# EAGLE board XM125_Breakout-Panel (EAGLE 9.6.2), part 1 of 4
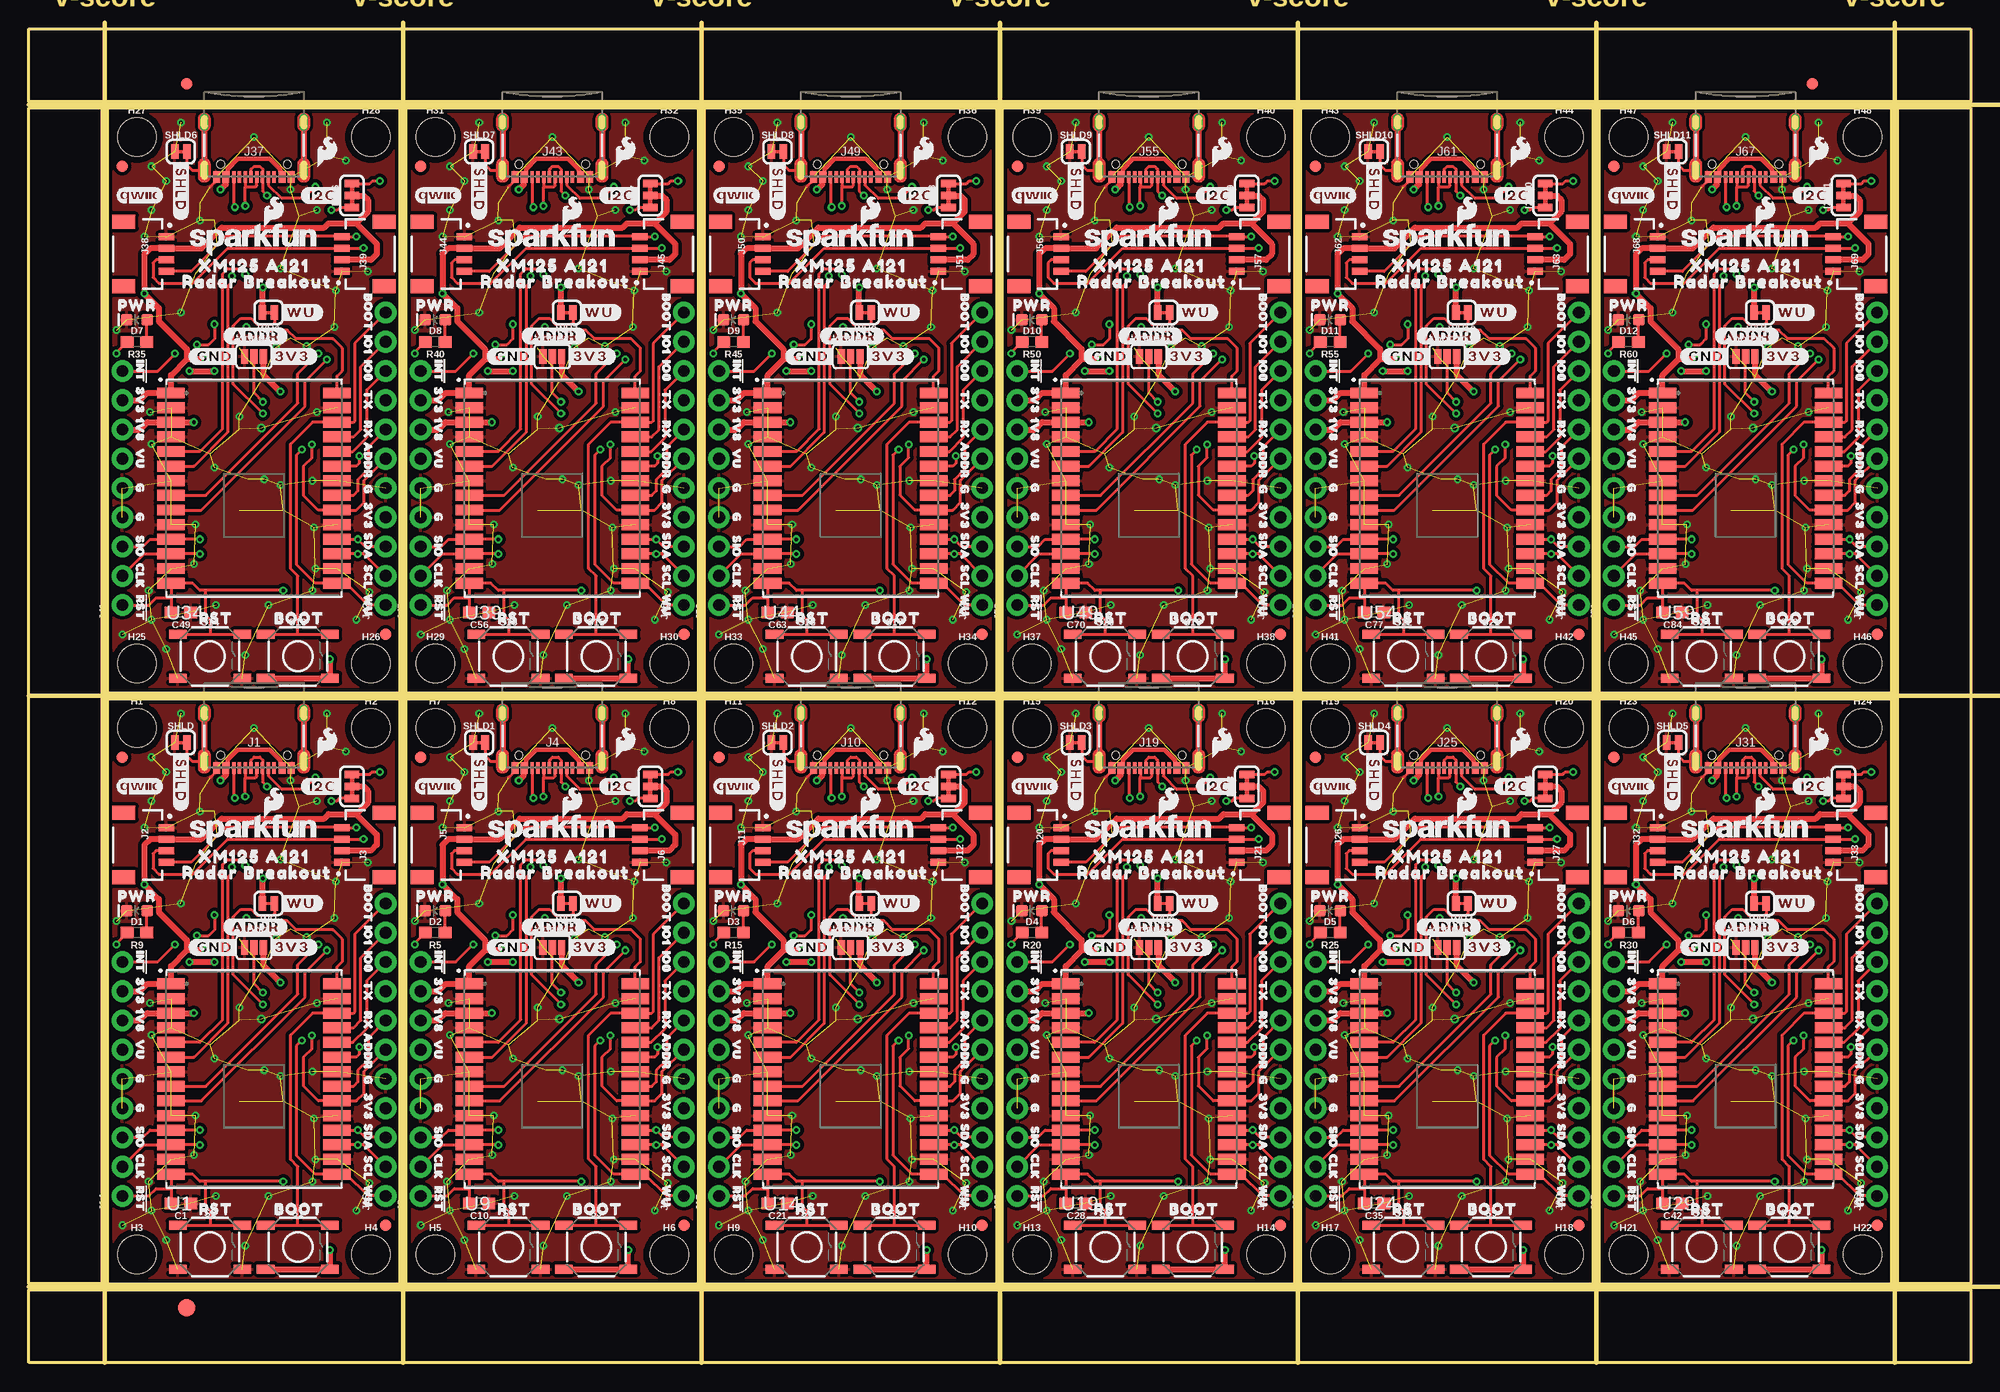
[diagram p0: board, top side]
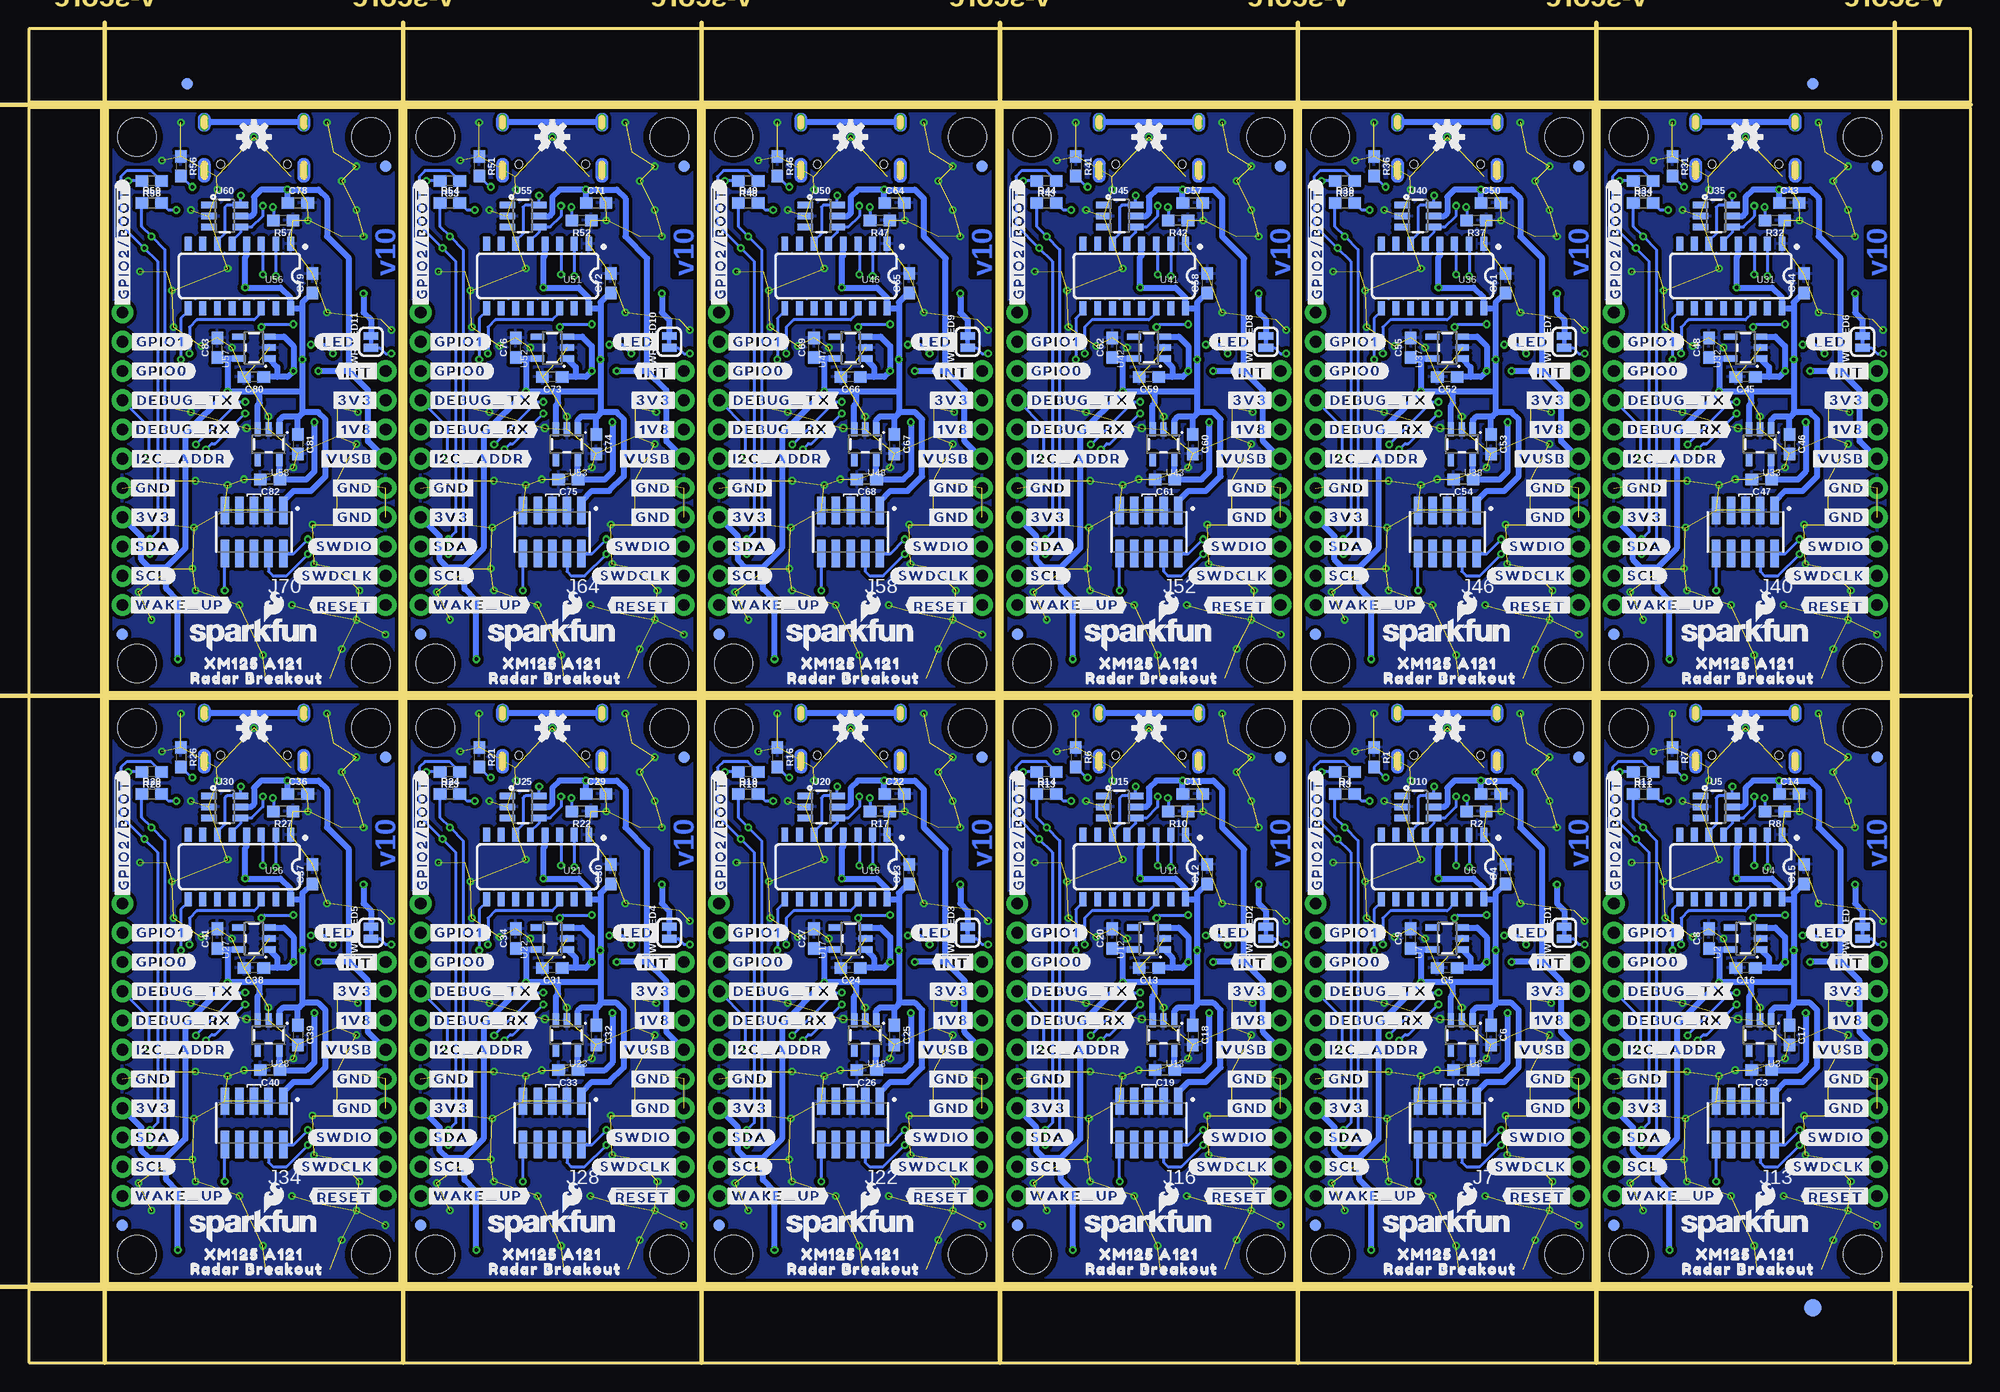
[diagram p1: board, bottom side, seen from below]

Size 168.66 x 115.82 mm. Coordinates in mm from the lower left corner, seen from the top.
Outline: 6.86,6.86 32.26,6.86 32.26,57.66 6.86,57.66 6.86,6.86
Outline: 32.77,6.86 58.17,6.86 58.17,57.66 32.77,57.66 32.77,6.86
Outline: 58.67,6.86 84.07,6.86 84.07,57.66 58.67,57.66 58.67,6.86
Outline: 84.58,6.86 109.98,6.86 109.98,57.66 84.58,57.66 84.58,6.86
Outline: 110.49,6.86 135.89,6.86 135.89,57.66 110.49,57.66 110.49,6.86
Outline: 136.4,6.86 161.8,6.86 161.8,57.66 136.4,57.66 136.4,6.86
Outline: 6.86,58.17 32.26,58.17 32.26,108.97 6.86,108.97 6.86,58.17
Outline: 32.77,58.17 58.17,58.17 58.17,108.97 32.77,108.97 32.77,58.17
Outline: 58.67,58.17 84.07,58.17 84.07,108.97 58.67,108.97 58.67,58.17
Outline: 84.58,58.17 109.98,58.17 109.98,108.97 84.58,108.97 84.58,58.17
Outline: 110.49,58.17 135.89,58.17 135.89,108.97 110.49,108.97 110.49,58.17
Outline: 136.4,58.17 161.8,58.17 161.8,108.97 136.4,108.97 136.4,58.17
Outline: 0,6.35 168.66,6.35 168.66,0 0,0 0,6.35
Outline: 162.31,108.97 168.66,108.97 168.66,6.86 162.31,6.86 162.31,108.97
Outline: 0,115.82 168.66,115.82 168.66,109.47 0,109.47 0,115.82
Outline: 0,108.97 6.35,108.97 6.35,6.86 0,6.86 0,108.97
Copper layers (1*16): Top 0.035mm / dielectric 1.5mm / Bottom 0.035mm
Design rules "XM125_Breakout": minimum track width 7mil, minimum drill 0.3mm, track to track 7mil, track to pad 7mil, pad to pad 7mil, via to via 7mil, smd to smd 7mil, copper to edge 7mil, drill to drill 7mil, minimum pad ring 7mil, minimum via ring 7mil, stop-mask expansion 3mil, vias tented up to drill 25mil, thermal gap 10mil
Milling: 10 lines

## Footprints (pad centres in the part's own frame; a part is rotated, then mirrored left to right if it is on the bottom)
SMT-JUMPER_3_NO_SILK = smd 0.635 x 1.27: 1 -0.813,0; 2 0,0; 3 0.813,0
0603 = smd 1.1 x 1: 1 -0.85,0; 2 0.85,0
LED-0603 = smd 1 x 1: A -0.877,0; C 0.877,0
FIDUCIAL-1X2 = smd 1 x 1: 1 0,0
FIDUCIAL-1.5X3 = smd 1.5 x 1.5: 1 0,0
STAND-OFF = hole 3.302: 0,0
SMT-JUMPER_3_2-NC_TRACE_SILK = smd 0.66 x 1.27: 1 -1.041,0; 2 0,0; 3 1.041,0
USB-C-16P-2LAYER-PADS = smd 0.3 x 1: A5 -1.25,-0.34; A6 -0.25,-0.34; A7 0.25,-0.34; A8 1.25,-0.34; B5 1.75,-0.34; B6 0.75,-0.34; B7 -0.75,-0.34; B8 -1.75,-0.34 | smd 0.6 x 1: GND -3.225,-0.34; GND2 3.225,-0.34; VBUS1 -2.45,-0.34; VBUS2 2.45,-0.34 | drill 0.4 pad 0.6 long: SHLD1 -4.318,-0.915; SHLD2 4.318,-0.915; SHLD3 -4.318,-5.095; SHLD4 4.318,-5.095 | hole 0.65: -2.89,-1.445; 2.89,-1.445
JST04_1MM_RA = smd 0.6 x 1.35: 1 -1.5,0; 2 -0.5,0; 3 0.5,0; 4 1.5,0 | smd 1.2 x 2: NC1 2.8,-3.675; NC2 -2.8,-3.675
2X5-SMD-UNSHROUDED_DNP_NO_PASTE = smd 0.74 x 2.38: 1 -2.54,-1.88; 2 -2.54,1.88; 3 -1.27,-1.88; 4 -1.27,1.88; 5 0,-1.88; 6 0,1.88; 7 1.27,-1.88; 8 1.27,1.88; 9 2.54,-1.88; 10 2.54,1.88
1X09_NO_SILK = drill 1.016 pad 1.88: 1 0,0; 2 2.54,0; 3 5.08,0; 4 7.62,0; 5 10.16,0; 6 12.7,0; 7 15.24,0; 8 17.78,0; 9 20.32,0
1X11_NO_SILK = drill 1.016 pad 1.88: 1 0,0; 2 2.54,0; 3 5.08,0; 4 7.62,0; 5 10.16,0; 6 12.7,0; 7 15.24,0; 8 17.78,0; 9 20.32,0; 10 22.86,0; 11 25.4,0
SMT-JUMPER_2_NC_TRACE_SILK = smd 0.66 x 1.27: 1 -0.521,0; 2 0.521,0
TACTILE_SWITCH_SMD_5.2MM = smd 1.524 x 0.762: 1 -2.794,1.905; 2 2.794,1.905; 3 -2.794,-1.905; 4 2.794,-1.905
XM125_ACC = smd 2.4 x 0.95: 1 -7.21,8.255; 2 -7.21,6.985; 3 -7.21,5.715; 4 -7.21,4.445; 5 -7.21,3.175; 6 -7.21,1.905; 7 -7.21,0.635; 8 -7.21,-0.635; 9 -7.21,-1.905; 10 -7.21,-3.175; 11 -7.21,-4.445; 12 -7.21,-5.715; 13 -7.21,-6.985; 14 -7.21,-8.255; 15 7.21,-8.255; 16 7.21,-6.985; 17 7.21,-5.715; 18 7.21,-4.445; 19 7.21,-3.175; 20 7.21,-1.905; 21 7.21,-0.635; 22 7.21,0.635; 23 7.21,1.905; 24 7.21,3.175; 25 7.21,4.445; 26 7.21,5.715; 27 7.21,6.985; 28 7.21,8.255
SOT23-5 = smd 0.55 x 1.2: 1 -0.95,-1.3; 2 0,-1.3; 3 0.95,-1.3; 4 0.95,1.3; 5 -0.95,1.3
SO016 = smd 0.6 x 1.2: 1 -4.445,-2.8; 2 -3.175,-2.8; 3 -1.905,-2.8; 4 -0.635,-2.8; 5 0.635,-2.8; 6 1.905,-2.8; 7 3.175,-2.8; 8 4.445,-2.8; 9 4.445,2.8; 10 3.175,2.8; 11 1.905,2.8; 12 0.635,2.8; 13 -0.635,2.8; 14 -1.905,2.8; 15 -3.175,2.8; 16 -4.445,2.8
SOT-23-6 = smd 0.55 x 1.35: 1 -0.95,-1.375; 2 0,-1.375; 3 0.95,-1.375; 4 0.95,1.375; 5 0,1.375; 6 -0.95,1.375

## Placement (x,y rotation side)
ADDR  JUMPER-SMT_3_NO_SILK  [SMT-JUMPER_3_NO_SILK]  19.56,36.07 0 top
ADDR1  JUMPER-SMT_3_NO_SILK  [SMT-JUMPER_3_NO_SILK]  45.47,36.07 0 top
ADDR2  JUMPER-SMT_3_NO_SILK  [SMT-JUMPER_3_NO_SILK]  71.37,36.07 0 top
ADDR3  JUMPER-SMT_3_NO_SILK  [SMT-JUMPER_3_NO_SILK]  97.28,36.07 0 top
ADDR4  JUMPER-SMT_3_NO_SILK  [SMT-JUMPER_3_NO_SILK]  123.19,36.07 0 top
ADDR5  JUMPER-SMT_3_NO_SILK  [SMT-JUMPER_3_NO_SILK]  149.1,36.07 0 top
ADDR6  JUMPER-SMT_3_NO_SILK  [SMT-JUMPER_3_NO_SILK]  19.56,87.38 0 top
ADDR7  JUMPER-SMT_3_NO_SILK  [SMT-JUMPER_3_NO_SILK]  45.47,87.38 0 top
ADDR8  JUMPER-SMT_3_NO_SILK  [SMT-JUMPER_3_NO_SILK]  71.37,87.38 0 top
ADDR9  JUMPER-SMT_3_NO_SILK  [SMT-JUMPER_3_NO_SILK]  97.28,87.38 0 top
ADDR10  JUMPER-SMT_3_NO_SILK  [SMT-JUMPER_3_NO_SILK]  123.19,87.38 0 top
ADDR11  JUMPER-SMT_3_NO_SILK  [SMT-JUMPER_3_NO_SILK]  149.1,87.38 0 top
C1  0.1uF  [0603]  13.21,13.84 180 top
C2  0.1uF  [0603]  41.66,49.4 0 bottom
C3  22uF  [0603]  18.16,25.4 180 bottom
C4  0.1uF  [0603]  40.39,42.42 90 bottom
C5  2.2uF  [0603]  45.47,34.29 180 bottom
C6  2.2uF  [0603]  41.66,28.45 270 bottom
C7  22uF  [0603]  44.07,25.4 180 bottom
C8  22uF  [0603]  22.73,36.83 90 bottom
C9  22uF  [0603]  48.64,36.83 90 bottom
C10  0.1uF  [0603]  39.12,13.84 180 top
C11  0.1uF  [0603]  67.56,49.4 0 bottom
C12  0.1uF  [0603]  66.29,42.42 90 bottom
C13  2.2uF  [0603]  71.37,34.29 180 bottom
C14  0.1uF  [0603]  15.75,49.4 0 bottom
C15  0.1uF  [0603]  14.48,42.42 90 bottom
C16  2.2uF  [0603]  19.56,34.29 180 bottom
C17  2.2uF  [0603]  15.75,28.45 270 bottom
C18  2.2uF  [0603]  67.56,28.45 270 bottom
C19  22uF  [0603]  69.98,25.4 180 bottom
C20  22uF  [0603]  74.55,36.83 90 bottom
C21  0.1uF  [0603]  65.02,13.84 180 top
C22  0.1uF  [0603]  93.47,49.4 0 bottom
C23  0.1uF  [0603]  92.2,42.42 90 bottom
C24  2.2uF  [0603]  97.28,34.29 180 bottom
C25  2.2uF  [0603]  93.47,28.45 270 bottom
C26  22uF  [0603]  95.89,25.4 180 bottom
C27  22uF  [0603]  100.46,36.83 90 bottom
C28  0.1uF  [0603]  90.93,13.84 180 top
C29  0.1uF  [0603]  119.38,49.4 0 bottom
C30  0.1uF  [0603]  118.11,42.42 90 bottom
C31  2.2uF  [0603]  123.19,34.29 180 bottom
C32  2.2uF  [0603]  119.38,28.45 270 bottom
C33  22uF  [0603]  121.79,25.4 180 bottom
C34  22uF  [0603]  126.37,36.83 90 bottom
C35  0.1uF  [0603]  116.84,13.84 180 top
C36  0.1uF  [0603]  145.29,49.4 0 bottom
C37  0.1uF  [0603]  144.02,42.42 90 bottom
C38  2.2uF  [0603]  149.1,34.29 180 bottom
C39  2.2uF  [0603]  145.29,28.45 270 bottom
C40  22uF  [0603]  147.7,25.4 180 bottom
C41  22uF  [0603]  152.27,36.83 90 bottom
C42  0.1uF  [0603]  142.75,13.84 180 top
C43  0.1uF  [0603]  15.75,100.71 0 bottom
C44  0.1uF  [0603]  14.48,93.73 90 bottom
C45  2.2uF  [0603]  19.56,85.6 180 bottom
C46  2.2uF  [0603]  15.75,79.76 270 bottom
C47  22uF  [0603]  18.16,76.71 180 bottom
C48  22uF  [0603]  22.73,88.14 90 bottom
C49  0.1uF  [0603]  13.21,65.15 180 top
C50  0.1uF  [0603]  41.66,100.71 0 bottom
C51  0.1uF  [0603]  40.39,93.73 90 bottom
C52  2.2uF  [0603]  45.47,85.6 180 bottom
C53  2.2uF  [0603]  41.66,79.76 270 bottom
C54  22uF  [0603]  44.07,76.71 180 bottom
C55  22uF  [0603]  48.64,88.14 90 bottom
C56  0.1uF  [0603]  39.12,65.15 180 top
C57  0.1uF  [0603]  67.56,100.71 0 bottom
C58  0.1uF  [0603]  66.29,93.73 90 bottom
C59  2.2uF  [0603]  71.37,85.6 180 bottom
C60  2.2uF  [0603]  67.56,79.76 270 bottom
C61  22uF  [0603]  69.98,76.71 180 bottom
C62  22uF  [0603]  74.55,88.14 90 bottom
C63  0.1uF  [0603]  65.02,65.15 180 top
C64  0.1uF  [0603]  93.47,100.71 0 bottom
C65  0.1uF  [0603]  92.2,93.73 90 bottom
C66  2.2uF  [0603]  97.28,85.6 180 bottom
C67  2.2uF  [0603]  93.47,79.76 270 bottom
C68  22uF  [0603]  95.89,76.71 180 bottom
C69  22uF  [0603]  100.46,88.14 90 bottom
C70  0.1uF  [0603]  90.93,65.15 180 top
C71  0.1uF  [0603]  119.38,100.71 0 bottom
C72  0.1uF  [0603]  118.11,93.73 90 bottom
C73  2.2uF  [0603]  123.19,85.6 180 bottom
C74  2.2uF  [0603]  119.38,79.76 270 bottom
C75  22uF  [0603]  121.79,76.71 180 bottom
C76  22uF  [0603]  126.37,88.14 90 bottom
C77  0.1uF  [0603]  116.84,65.15 180 top
C78  0.1uF  [0603]  145.29,100.71 0 bottom
C79  0.1uF  [0603]  144.02,93.73 90 bottom
C80  2.2uF  [0603]  149.1,85.6 180 bottom
C81  2.2uF  [0603]  145.29,79.76 270 bottom
C82  22uF  [0603]  147.7,76.71 180 bottom
C83  22uF  [0603]  152.27,88.14 90 bottom
C84  0.1uF  [0603]  142.75,65.15 180 top
D1  Red  [LED-0603]  9.4,39.24 180 top
D2  Red  [LED-0603]  35.31,39.24 180 top
D3  Red  [LED-0603]  61.21,39.24 180 top
D4  Red  [LED-0603]  87.12,39.24 180 top
D5  Red  [LED-0603]  113.03,39.24 180 top
D6  Red  [LED-0603]  138.94,39.24 180 top
D7  Red  [LED-0603]  9.4,90.55 180 top
D8  Red  [LED-0603]  35.31,90.55 180 top
D9  Red  [LED-0603]  61.21,90.55 180 top
D10  Red  [LED-0603]  87.12,90.55 180 top
D11  Red  [LED-0603]  113.03,90.55 180 top
D12  Red  [LED-0603]  138.94,90.55 180 top
E$1  [FIDUCIAL-1X2]  13.72,111.06 0 top
E$2  [FIDUCIAL-1X2]  13.72,111.06 0 bottom
E$3  [FIDUCIAL-1X2]  154.88,111.06 0 top
E$4  [FIDUCIAL-1X2]  154.88,111.06 0 bottom
E$5  [FIDUCIAL-1.5X3]  13.72,4.76 0 top
E$6  [FIDUCIAL-1.5X3]  13.72,4.76 0 bottom
FD1  FIDUCIAL1X2  [FIDUCIAL-1X2]  8.13,52.58 0 top
FD2  FIDUCIAL1X2  [FIDUCIAL-1X2]  8.13,52.58 0 bottom
FD3  FIDUCIAL1X2  [FIDUCIAL-1X2]  30.99,11.94 0 top
FD4  FIDUCIAL1X2  [FIDUCIAL-1X2]  30.99,11.94 0 bottom
FD5  FIDUCIAL1X2  [FIDUCIAL-1X2]  34.04,52.58 0 top
FD6  FIDUCIAL1X2  [FIDUCIAL-1X2]  34.04,52.58 0 bottom
FD7  FIDUCIAL1X2  [FIDUCIAL-1X2]  56.9,11.94 0 top
FD8  FIDUCIAL1X2  [FIDUCIAL-1X2]  56.9,11.94 0 bottom
FD9  FIDUCIAL1X2  [FIDUCIAL-1X2]  59.94,52.58 0 top
FD10  FIDUCIAL1X2  [FIDUCIAL-1X2]  59.94,52.58 0 bottom
FD11  FIDUCIAL1X2  [FIDUCIAL-1X2]  82.8,11.94 0 top
FD12  FIDUCIAL1X2  [FIDUCIAL-1X2]  82.8,11.94 0 bottom
FD13  FIDUCIAL1X2  [FIDUCIAL-1X2]  85.85,52.58 0 top
FD14  FIDUCIAL1X2  [FIDUCIAL-1X2]  85.85,52.58 0 bottom
FD15  FIDUCIAL1X2  [FIDUCIAL-1X2]  108.71,11.94 0 top
FD16  FIDUCIAL1X2  [FIDUCIAL-1X2]  108.71,11.94 0 bottom
FD17  FIDUCIAL1X2  [FIDUCIAL-1X2]  111.76,52.58 0 top
FD18  FIDUCIAL1X2  [FIDUCIAL-1X2]  111.76,52.58 0 bottom
FD19  FIDUCIAL1X2  [FIDUCIAL-1X2]  134.62,11.94 0 top
FD20  FIDUCIAL1X2  [FIDUCIAL-1X2]  134.62,11.94 0 bottom
FD21  FIDUCIAL1X2  [FIDUCIAL-1X2]  137.67,52.58 0 top
FD22  FIDUCIAL1X2  [FIDUCIAL-1X2]  137.67,52.58 0 bottom
FD23  FIDUCIAL1X2  [FIDUCIAL-1X2]  160.53,11.94 0 top
FD24  FIDUCIAL1X2  [FIDUCIAL-1X2]  160.53,11.94 0 bottom
FD25  FIDUCIAL1X2  [FIDUCIAL-1X2]  8.13,103.89 0 top
FD26  FIDUCIAL1X2  [FIDUCIAL-1X2]  8.13,103.89 0 bottom
FD27  FIDUCIAL1X2  [FIDUCIAL-1X2]  30.99,63.25 0 top
FD28  FIDUCIAL1X2  [FIDUCIAL-1X2]  30.99,63.25 0 bottom
FD29  FIDUCIAL1X2  [FIDUCIAL-1X2]  34.04,103.89 0 top
FD30  FIDUCIAL1X2  [FIDUCIAL-1X2]  34.04,103.89 0 bottom
FD31  FIDUCIAL1X2  [FIDUCIAL-1X2]  56.9,63.25 0 top
FD32  FIDUCIAL1X2  [FIDUCIAL-1X2]  56.9,63.25 0 bottom
FD33  FIDUCIAL1X2  [FIDUCIAL-1X2]  59.94,103.89 0 top
FD34  FIDUCIAL1X2  [FIDUCIAL-1X2]  59.94,103.89 0 bottom
FD35  FIDUCIAL1X2  [FIDUCIAL-1X2]  82.8,63.25 0 top
FD36  FIDUCIAL1X2  [FIDUCIAL-1X2]  82.8,63.25 0 bottom
FD37  FIDUCIAL1X2  [FIDUCIAL-1X2]  85.85,103.89 0 top
FD38  FIDUCIAL1X2  [FIDUCIAL-1X2]  85.85,103.89 0 bottom
FD39  FIDUCIAL1X2  [FIDUCIAL-1X2]  108.71,63.25 0 top
FD40  FIDUCIAL1X2  [FIDUCIAL-1X2]  108.71,63.25 0 bottom
FD41  FIDUCIAL1X2  [FIDUCIAL-1X2]  111.76,103.89 0 top
FD42  FIDUCIAL1X2  [FIDUCIAL-1X2]  111.76,103.89 0 bottom
FD43  FIDUCIAL1X2  [FIDUCIAL-1X2]  134.62,63.25 0 top
FD44  FIDUCIAL1X2  [FIDUCIAL-1X2]  134.62,63.25 0 bottom
FD45  FIDUCIAL1X2  [FIDUCIAL-1X2]  137.67,103.89 0 top
FD46  FIDUCIAL1X2  [FIDUCIAL-1X2]  137.67,103.89 0 bottom
FD47  FIDUCIAL1X2  [FIDUCIAL-1X2]  160.53,63.25 0 top
FD48  FIDUCIAL1X2  [FIDUCIAL-1X2]  160.53,63.25 0 bottom
H1  STAND-OFF  [STAND-OFF]  9.4,55.12 0 top
H2  STAND-OFF  [STAND-OFF]  29.72,55.12 0 top
H3  STAND-OFF  [STAND-OFF]  9.4,9.4 0 top
H4  STAND-OFF  [STAND-OFF]  29.72,9.4 0 top
H5  STAND-OFF  [STAND-OFF]  35.31,9.4 0 top
H6  STAND-OFF  [STAND-OFF]  55.63,9.4 0 top
H7  STAND-OFF  [STAND-OFF]  35.31,55.12 0 top
H8  STAND-OFF  [STAND-OFF]  55.63,55.12 0 top
H9  STAND-OFF  [STAND-OFF]  61.21,9.4 0 top
H10  STAND-OFF  [STAND-OFF]  81.53,9.4 0 top
H11  STAND-OFF  [STAND-OFF]  61.21,55.12 0 top
H12  STAND-OFF  [STAND-OFF]  81.53,55.12 0 top
H13  STAND-OFF  [STAND-OFF]  87.12,9.4 0 top
H14  STAND-OFF  [STAND-OFF]  107.44,9.4 0 top
H15  STAND-OFF  [STAND-OFF]  87.12,55.12 0 top
H16  STAND-OFF  [STAND-OFF]  107.44,55.12 0 top
H17  STAND-OFF  [STAND-OFF]  113.03,9.4 0 top
H18  STAND-OFF  [STAND-OFF]  133.35,9.4 0 top
H19  STAND-OFF  [STAND-OFF]  113.03,55.12 0 top
H20  STAND-OFF  [STAND-OFF]  133.35,55.12 0 top
H21  STAND-OFF  [STAND-OFF]  138.94,9.4 0 top
H22  STAND-OFF  [STAND-OFF]  159.26,9.4 0 top
H23  STAND-OFF  [STAND-OFF]  138.94,55.12 0 top
H24  STAND-OFF  [STAND-OFF]  159.26,55.12 0 top
H25  STAND-OFF  [STAND-OFF]  9.4,60.71 0 top
H26  STAND-OFF  [STAND-OFF]  29.72,60.71 0 top
H27  STAND-OFF  [STAND-OFF]  9.4,106.43 0 top
H28  STAND-OFF  [STAND-OFF]  29.72,106.43 0 top
H29  STAND-OFF  [STAND-OFF]  35.31,60.71 0 top
H30  STAND-OFF  [STAND-OFF]  55.63,60.71 0 top
H31  STAND-OFF  [STAND-OFF]  35.31,106.43 0 top
H32  STAND-OFF  [STAND-OFF]  55.63,106.43 0 top
H33  STAND-OFF  [STAND-OFF]  61.21,60.71 0 top
H34  STAND-OFF  [STAND-OFF]  81.53,60.71 0 top
H35  STAND-OFF  [STAND-OFF]  61.21,106.43 0 top
H36  STAND-OFF  [STAND-OFF]  81.53,106.43 0 top
H37  STAND-OFF  [STAND-OFF]  87.12,60.71 0 top
H38  STAND-OFF  [STAND-OFF]  107.44,60.71 0 top
H39  STAND-OFF  [STAND-OFF]  87.12,106.43 0 top
H40  STAND-OFF  [STAND-OFF]  107.44,106.43 0 top
H41  STAND-OFF  [STAND-OFF]  113.03,60.71 0 top
H42  STAND-OFF  [STAND-OFF]  133.35,60.71 0 top
H43  STAND-OFF  [STAND-OFF]  113.03,106.43 0 top
H44  STAND-OFF  [STAND-OFF]  133.35,106.43 0 top
H45  STAND-OFF  [STAND-OFF]  138.94,60.71 0 top
H46  STAND-OFF  [STAND-OFF]  159.26,60.71 0 top
H47  STAND-OFF  [STAND-OFF]  138.94,106.43 0 top
H48  STAND-OFF  [STAND-OFF]  159.26,106.43 0 top
I2C  JUMPER-SMT_3_2-NC_TRACE_SILK  [SMT-JUMPER_3_2-NC_TRACE_SILK]  28.07,50.04 90 top
I2C1  JUMPER-SMT_3_2-NC_TRACE_SILK  [SMT-JUMPER_3_2-NC_TRACE_SILK]  53.97,50.04 90 top
I2C2  JUMPER-SMT_3_2-NC_TRACE_SILK  [SMT-JUMPER_3_2-NC_TRACE_SILK]  79.88,50.04 90 top
I2C3  JUMPER-SMT_3_2-NC_TRACE_SILK  [SMT-JUMPER_3_2-NC_TRACE_SILK]  105.79,50.04 90 top
I2C4  JUMPER-SMT_3_2-NC_TRACE_SILK  [SMT-JUMPER_3_2-NC_TRACE_SILK]  131.7,50.04 90 top
I2C5  JUMPER-SMT_3_2-NC_TRACE_SILK  [SMT-JUMPER_3_2-NC_TRACE_SILK]  157.61,50.04 90 top
I2C6  JUMPER-SMT_3_2-NC_TRACE_SILK  [SMT-JUMPER_3_2-NC_TRACE_SILK]  28.07,101.35 90 top
I2C7  JUMPER-SMT_3_2-NC_TRACE_SILK  [SMT-JUMPER_3_2-NC_TRACE_SILK]  53.97,101.35 90 top
I2C8  JUMPER-SMT_3_2-NC_TRACE_SILK  [SMT-JUMPER_3_2-NC_TRACE_SILK]  79.88,101.35 90 top
I2C9  JUMPER-SMT_3_2-NC_TRACE_SILK  [SMT-JUMPER_3_2-NC_TRACE_SILK]  105.79,101.35 90 top
I2C10  JUMPER-SMT_3_2-NC_TRACE_SILK  [SMT-JUMPER_3_2-NC_TRACE_SILK]  131.7,101.35 90 top
I2C11  JUMPER-SMT_3_2-NC_TRACE_SILK  [SMT-JUMPER_3_2-NC_TRACE_SILK]  157.61,101.35 90 top
J1  [USB-C-16P-2LAYER-PADS]  19.56,51.31 180 top
J2  RIGHT_ANGLE  [JST04_1MM_RA]  11.94,44.96 270 top
J3  RIGHT_ANGLE  [JST04_1MM_RA]  27.18,44.96 90 top
J4  [USB-C-16P-2LAYER-PADS]  45.47,51.31 180 top
J5  RIGHT_ANGLE  [JST04_1MM_RA]  37.85,44.96 270 top
J6  RIGHT_ANGLE  [JST04_1MM_RA]  53.09,44.96 90 top
J7  SWD (DNP)  [2X5-SMD-UNSHROUDED_DNP_NO_PASTE]  45.47,20.83 180 bottom
J8  [1X09_NO_SILK]  34.04,14.48 90 top
J9  [1X11_NO_SILK]  56.9,14.48 90 top
J10  [USB-C-16P-2LAYER-PADS]  71.37,51.31 180 top
J11  RIGHT_ANGLE  [JST04_1MM_RA]  63.75,44.96 270 top
J12  RIGHT_ANGLE  [JST04_1MM_RA]  78.99,44.96 90 top
J13  SWD (DNP)  [2X5-SMD-UNSHROUDED_DNP_NO_PASTE]  19.56,20.83 180 bottom
J14  [1X09_NO_SILK]  8.13,14.48 90 top
J15  [1X11_NO_SILK]  30.99,14.48 90 top
J16  SWD (DNP)  [2X5-SMD-UNSHROUDED_DNP_NO_PASTE]  71.37,20.83 180 bottom
J17  [1X09_NO_SILK]  59.94,14.48 90 top
J18  [1X11_NO_SILK]  82.8,14.48 90 top
J19  [USB-C-16P-2LAYER-PADS]  97.28,51.31 180 top
J20  RIGHT_ANGLE  [JST04_1MM_RA]  89.66,44.96 270 top
J21  RIGHT_ANGLE  [JST04_1MM_RA]  104.9,44.96 90 top
J22  SWD (DNP)  [2X5-SMD-UNSHROUDED_DNP_NO_PASTE]  97.28,20.83 180 bottom
J23  [1X09_NO_SILK]  85.85,14.48 90 top
J24  [1X11_NO_SILK]  108.71,14.48 90 top
J25  [USB-C-16P-2LAYER-PADS]  123.19,51.31 180 top
J26  RIGHT_ANGLE  [JST04_1MM_RA]  115.57,44.96 270 top
J27  RIGHT_ANGLE  [JST04_1MM_RA]  130.81,44.96 90 top
J28  SWD (DNP)  [2X5-SMD-UNSHROUDED_DNP_NO_PASTE]  123.19,20.83 180 bottom
J29  [1X09_NO_SILK]  111.76,14.48 90 top
J30  [1X11_NO_SILK]  134.62,14.48 90 top
J31  [USB-C-16P-2LAYER-PADS]  149.1,51.31 180 top
J32  RIGHT_ANGLE  [JST04_1MM_RA]  141.48,44.96 270 top
J33  RIGHT_ANGLE  [JST04_1MM_RA]  156.72,44.96 90 top
J34  SWD (DNP)  [2X5-SMD-UNSHROUDED_DNP_NO_PASTE]  149.1,20.83 180 bottom
J35  [1X09_NO_SILK]  137.67,14.48 90 top
J36  [1X11_NO_SILK]  160.53,14.48 90 top
J37  [USB-C-16P-2LAYER-PADS]  19.56,102.62 180 top
J38  RIGHT_ANGLE  [JST04_1MM_RA]  11.94,96.27 270 top
J39  RIGHT_ANGLE  [JST04_1MM_RA]  27.18,96.27 90 top
J40  SWD (DNP)  [2X5-SMD-UNSHROUDED_DNP_NO_PASTE]  19.56,72.14 180 bottom
J41  [1X09_NO_SILK]  8.13,65.79 90 top
J42  [1X11_NO_SILK]  30.99,65.79 90 top
J43  [USB-C-16P-2LAYER-PADS]  45.47,102.62 180 top
J44  RIGHT_ANGLE  [JST04_1MM_RA]  37.85,96.27 270 top
J45  RIGHT_ANGLE  [JST04_1MM_RA]  53.09,96.27 90 top
J46  SWD (DNP)  [2X5-SMD-UNSHROUDED_DNP_NO_PASTE]  45.47,72.14 180 bottom
J47  [1X09_NO_SILK]  34.04,65.79 90 top
J48  [1X11_NO_SILK]  56.9,65.79 90 top
J49  [USB-C-16P-2LAYER-PADS]  71.37,102.62 180 top
J50  RIGHT_ANGLE  [JST04_1MM_RA]  63.75,96.27 270 top
J51  RIGHT_ANGLE  [JST04_1MM_RA]  78.99,96.27 90 top
J52  SWD (DNP)  [2X5-SMD-UNSHROUDED_DNP_NO_PASTE]  71.37,72.14 180 bottom
J53  [1X09_NO_SILK]  59.94,65.79 90 top
J54  [1X11_NO_SILK]  82.8,65.79 90 top
J55  [USB-C-16P-2LAYER-PADS]  97.28,102.62 180 top
J56  RIGHT_ANGLE  [JST04_1MM_RA]  89.66,96.27 270 top
J57  RIGHT_ANGLE  [JST04_1MM_RA]  104.9,96.27 90 top
J58  SWD (DNP)  [2X5-SMD-UNSHROUDED_DNP_NO_PASTE]  97.28,72.14 180 bottom
J59  [1X09_NO_SILK]  85.85,65.79 90 top
J60  [1X11_NO_SILK]  108.71,65.79 90 top
J61  [USB-C-16P-2LAYER-PADS]  123.19,102.62 180 top
J62  RIGHT_ANGLE  [JST04_1MM_RA]  115.57,96.27 270 top
J63  RIGHT_ANGLE  [JST04_1MM_RA]  130.81,96.27 90 top
J64  SWD (DNP)  [2X5-SMD-UNSHROUDED_DNP_NO_PASTE]  123.19,72.14 180 bottom
J65  [1X09_NO_SILK]  111.76,65.79 90 top
J66  [1X11_NO_SILK]  134.62,65.79 90 top
J67  [USB-C-16P-2LAYER-PADS]  149.1,102.62 180 top
J68  RIGHT_ANGLE  [JST04_1MM_RA]  141.48,96.27 270 top
J69  RIGHT_ANGLE  [JST04_1MM_RA]  156.72,96.27 90 top
J70  SWD (DNP)  [2X5-SMD-UNSHROUDED_DNP_NO_PASTE]  149.1,72.14 180 bottom
J71  [1X09_NO_SILK]  137.67,65.79 90 top
J72  [1X11_NO_SILK]  160.53,65.79 90 top
LOGO1  QWIIC_LOGO_4MM  [QWIIC_4MM]  35.56,50.04 0 top
LOGO2  QWIIC_LOGO_4MM  [QWIIC_4MM]  9.65,50.04 0 top
LOGO3  SFE_LOGO_NAME_FLAME.1_INCH  [SFE_LOGO_NAME_FLAME_.1]  19.56,11.94 0 bottom
LOGO4  OSHW-LOGOS  [OSHW-LOGO-S]  19.56,55.12 0 bottom
LOGO5  SFE_LOGO_FLAME.1_INCH  [SFE_LOGO_FLAME_.1]  25.91,53.85 0 top
LOGO6  SFE_LOGO_NAME_FLAME.1_INCH  [SFE_LOGO_NAME_FLAME_.1]  19.56,46.23 0 top
LOGO7  SFE_LOGO_NAME_FLAME.1_INCH  [SFE_LOGO_NAME_FLAME_.1]  45.47,11.94 0 bottom
LOGO8  OSHW-LOGOS  [OSHW-LOGO-S]  45.47,55.12 0 bottom
LOGO9  SFE_LOGO_FLAME.1_INCH  [SFE_LOGO_FLAME_.1]  51.82,53.85 0 top
LOGO10  SFE_LOGO_NAME_FLAME.1_INCH  [SFE_LOGO_NAME_FLAME_.1]  45.47,46.23 0 top
LOGO11  QWIIC_LOGO_4MM  [QWIIC_4MM]  61.47,50.04 0 top
LOGO12  SFE_LOGO_NAME_FLAME.1_INCH  [SFE_LOGO_NAME_FLAME_.1]  71.37,11.94 0 bottom
LOGO13  OSHW-LOGOS  [OSHW-LOGO-S]  71.37,55.12 0 bottom
LOGO14  SFE_LOGO_FLAME.1_INCH  [SFE_LOGO_FLAME_.1]  77.72,53.85 0 top
LOGO15  SFE_LOGO_NAME_FLAME.1_INCH  [SFE_LOGO_NAME_FLAME_.1]  71.37,46.23 0 top
LOGO16  QWIIC_LOGO_4MM  [QWIIC_4MM]  87.38,50.04 0 top
LOGO17  SFE_LOGO_NAME_FLAME.1_INCH  [SFE_LOGO_NAME_FLAME_.1]  97.28,11.94 0 bottom
LOGO18  OSHW-LOGOS  [OSHW-LOGO-S]  97.28,55.12 0 bottom
LOGO19  SFE_LOGO_FLAME.1_INCH  [SFE_LOGO_FLAME_.1]  103.63,53.85 0 top
LOGO20  SFE_LOGO_NAME_FLAME.1_INCH  [SFE_LOGO_NAME_FLAME_.1]  97.28,46.23 0 top
LOGO21  QWIIC_LOGO_4MM  [QWIIC_4MM]  113.28,50.04 0 top
LOGO22  SFE_LOGO_NAME_FLAME.1_INCH  [SFE_LOGO_NAME_FLAME_.1]  123.19,11.94 0 bottom
LOGO23  OSHW-LOGOS  [OSHW-LOGO-S]  123.19,55.12 0 bottom
LOGO24  SFE_LOGO_FLAME.1_INCH  [SFE_LOGO_FLAME_.1]  129.54,53.85 0 top
LOGO25  SFE_LOGO_NAME_FLAME.1_INCH  [SFE_LOGO_NAME_FLAME_.1]  123.19,46.23 0 top
LOGO26  QWIIC_LOGO_4MM  [QWIIC_4MM]  139.19,50.04 0 top
LOGO27  SFE_LOGO_NAME_FLAME.1_INCH  [SFE_LOGO_NAME_FLAME_.1]  149.1,11.94 0 bottom
LOGO28  OSHW-LOGOS  [OSHW-LOGO-S]  149.1,55.12 0 bottom
LOGO29  SFE_LOGO_FLAME.1_INCH  [SFE_LOGO_FLAME_.1]  155.45,53.85 0 top
LOGO30  SFE_LOGO_NAME_FLAME.1_INCH  [SFE_LOGO_NAME_FLAME_.1]  149.1,46.23 0 top
LOGO31  QWIIC_LOGO_4MM  [QWIIC_4MM]  9.65,101.35 0 top
LOGO32  SFE_LOGO_NAME_FLAME.1_INCH  [SFE_LOGO_NAME_FLAME_.1]  19.56,63.25 0 bottom
LOGO33  OSHW-LOGOS  [OSHW-LOGO-S]  19.56,106.43 0 bottom
LOGO34  SFE_LOGO_FLAME.1_INCH  [SFE_LOGO_FLAME_.1]  25.91,105.16 0 top
LOGO35  SFE_LOGO_NAME_FLAME.1_INCH  [SFE_LOGO_NAME_FLAME_.1]  19.56,97.54 0 top
LOGO36  QWIIC_LOGO_4MM  [QWIIC_4MM]  35.56,101.35 0 top
LOGO37  SFE_LOGO_NAME_FLAME.1_INCH  [SFE_LOGO_NAME_FLAME_.1]  45.47,63.25 0 bottom
LOGO38  OSHW-LOGOS  [OSHW-LOGO-S]  45.47,106.43 0 bottom
LOGO39  SFE_LOGO_FLAME.1_INCH  [SFE_LOGO_FLAME_.1]  51.82,105.16 0 top
LOGO40  SFE_LOGO_NAME_FLAME.1_INCH  [SFE_LOGO_NAME_FLAME_.1]  45.47,97.54 0 top
LOGO41  QWIIC_LOGO_4MM  [QWIIC_4MM]  61.47,101.35 0 top
LOGO42  SFE_LOGO_NAME_FLAME.1_INCH  [SFE_LOGO_NAME_FLAME_.1]  71.37,63.25 0 bottom
LOGO43  OSHW-LOGOS  [OSHW-LOGO-S]  71.37,106.43 0 bottom
LOGO44  SFE_LOGO_FLAME.1_INCH  [SFE_LOGO_FLAME_.1]  77.72,105.16 0 top
LOGO45  SFE_LOGO_NAME_FLAME.1_INCH  [SFE_LOGO_NAME_FLAME_.1]  71.37,97.54 0 top
LOGO46  QWIIC_LOGO_4MM  [QWIIC_4MM]  87.38,101.35 0 top
LOGO47  SFE_LOGO_NAME_FLAME.1_INCH  [SFE_LOGO_NAME_FLAME_.1]  97.28,63.25 0 bottom
LOGO48  OSHW-LOGOS  [OSHW-LOGO-S]  97.28,106.43 0 bottom
LOGO49  SFE_LOGO_FLAME.1_INCH  [SFE_LOGO_FLAME_.1]  103.63,105.16 0 top
LOGO50  SFE_LOGO_NAME_FLAME.1_INCH  [SFE_LOGO_NAME_FLAME_.1]  97.28,97.54 0 top
LOGO51  QWIIC_LOGO_4MM  [QWIIC_4MM]  113.28,101.35 0 top
LOGO52  SFE_LOGO_NAME_FLAME.1_INCH  [SFE_LOGO_NAME_FLAME_.1]  123.19,63.25 0 bottom
LOGO53  OSHW-LOGOS  [OSHW-LOGO-S]  123.19,106.43 0 bottom
LOGO54  SFE_LOGO_FLAME.1_INCH  [SFE_LOGO_FLAME_.1]  129.54,105.16 0 top
LOGO55  SFE_LOGO_NAME_FLAME.1_INCH  [SFE_LOGO_NAME_FLAME_.1]  123.19,97.54 0 top
LOGO56  QWIIC_LOGO_4MM  [QWIIC_4MM]  139.19,101.35 0 top
LOGO57  SFE_LOGO_NAME_FLAME.1_INCH  [SFE_LOGO_NAME_FLAME_.1]  149.1,63.25 0 bottom
LOGO58  OSHW-LOGOS  [OSHW-LOGO-S]  149.1,106.43 0 bottom
LOGO59  SFE_LOGO_FLAME.1_INCH  [SFE_LOGO_FLAME_.1]  155.45,105.16 0 top
LOGO60  SFE_LOGO_NAME_FLAME.1_INCH  [SFE_LOGO_NAME_FLAME_.1]  149.1,97.54 0 top
PWR_LED  JUMPER-SMT_2_NC_TRACE_SILK  [SMT-JUMPER_2_NC_TRACE_SILK]  9.4,37.34 90 bottom
PWR_LED1  JUMPER-SMT_2_NC_TRACE_SILK  [SMT-JUMPER_2_NC_TRACE_SILK]  35.31,37.34 90 bottom
PWR_LED2  JUMPER-SMT_2_NC_TRACE_SILK  [SMT-JUMPER_2_NC_TRACE_SILK]  61.21,37.34 90 bottom
PWR_LED3  JUMPER-SMT_2_NC_TRACE_SILK  [SMT-JUMPER_2_NC_TRACE_SILK]  87.12,37.34 90 bottom
PWR_LED4  JUMPER-SMT_2_NC_TRACE_SILK  [SMT-JUMPER_2_NC_TRACE_SILK]  113.03,37.34 90 bottom
PWR_LED5  JUMPER-SMT_2_NC_TRACE_SILK  [SMT-JUMPER_2_NC_TRACE_SILK]  138.94,37.34 90 bottom
PWR_LED6  JUMPER-SMT_2_NC_TRACE_SILK  [SMT-JUMPER_2_NC_TRACE_SILK]  9.4,88.65 90 bottom
PWR_LED7  JUMPER-SMT_2_NC_TRACE_SILK  [SMT-JUMPER_2_NC_TRACE_SILK]  35.31,88.65 90 bottom
PWR_LED8  JUMPER-SMT_2_NC_TRACE_SILK  [SMT-JUMPER_2_NC_TRACE_SILK]  61.21,88.65 90 bottom
PWR_LED9  JUMPER-SMT_2_NC_TRACE_SILK  [SMT-JUMPER_2_NC_TRACE_SILK]  87.12,88.65 90 bottom
PWR_LED10  JUMPER-SMT_2_NC_TRACE_SILK  [SMT-JUMPER_2_NC_TRACE_SILK]  113.03,88.65 90 bottom
PWR_LED11  JUMPER-SMT_2_NC_TRACE_SILK  [SMT-JUMPER_2_NC_TRACE_SILK]  138.94,88.65 90 bottom
R1  5.1k  [0603]  51.82,52.58 270 bottom
R2  5.1k  [0603]  42.93,47.88 180 bottom
R3  2.2k  [0603]  54.36,51.31 180 bottom
R4  2.2k  [0603]  54.36,49.4 0 bottom
R5  4.7k  [0603]  35.31,37.34 180 top
R6  5.1k  [0603]  77.72,52.58 270 bottom
R7  5.1k  [0603]  25.91,52.58 270 bottom
R8  5.1k  [0603]  17.02,47.88 180 bottom
R9  4.7k  [0603]  9.4,37.34 180 top
R10  5.1k  [0603]  68.83,47.88 180 bottom
R11  2.2k  [0603]  28.45,51.31 180 bottom
R12  2.2k  [0603]  28.45,49.4 0 bottom
R13  2.2k  [0603]  80.26,51.31 180 bottom
R14  2.2k  [0603]  80.26,49.4 0 bottom
R15  4.7k  [0603]  61.21,37.34 180 top
R16  5.1k  [0603]  103.63,52.58 270 bottom
R17  5.1k  [0603]  94.74,47.88 180 bottom
R18  2.2k  [0603]  106.17,51.31 180 bottom
R19  2.2k  [0603]  106.17,49.4 0 bottom
R20  4.7k  [0603]  87.12,37.34 180 top
R21  5.1k  [0603]  129.54,52.58 270 bottom
R22  5.1k  [0603]  120.65,47.88 180 bottom
R23  2.2k  [0603]  132.08,51.31 180 bottom
R24  2.2k  [0603]  132.08,49.4 0 bottom
R25  4.7k  [0603]  113.03,37.34 180 top
R26  5.1k  [0603]  155.45,52.58 270 bottom
R27  5.1k  [0603]  146.56,47.88 180 bottom
R28  2.2k  [0603]  157.99,51.31 180 bottom
R29  2.2k  [0603]  157.99,49.4 0 bottom
R30  4.7k  [0603]  138.94,37.34 180 top
R31  5.1k  [0603]  25.91,103.89 270 bottom
R32  5.1k  [0603]  17.02,99.19 180 bottom
R33  2.2k  [0603]  28.45,102.62 180 bottom
R34  2.2k  [0603]  28.45,100.71 0 bottom
R35  4.7k  [0603]  9.4,88.65 180 top
R36  5.1k  [0603]  51.82,103.89 270 bottom
R37  5.1k  [0603]  42.93,99.19 180 bottom
R38  2.2k  [0603]  54.36,102.62 180 bottom
R39  2.2k  [0603]  54.36,100.71 0 bottom
R40  4.7k  [0603]  35.31,88.65 180 top
R41  5.1k  [0603]  77.72,103.89 270 bottom
R42  5.1k  [0603]  68.83,99.19 180 bottom
R43  2.2k  [0603]  80.26,102.62 180 bottom
R44  2.2k  [0603]  80.26,100.71 0 bottom
R45  4.7k  [0603]  61.21,88.65 180 top
R46  5.1k  [0603]  103.63,103.89 270 bottom
R47  5.1k  [0603]  94.74,99.19 180 bottom
R48  2.2k  [0603]  106.17,102.62 180 bottom
R49  2.2k  [0603]  106.17,100.71 0 bottom
R50  4.7k  [0603]  87.12,88.65 180 top
R51  5.1k  [0603]  129.54,103.89 270 bottom
R52  5.1k  [0603]  120.65,99.19 180 bottom
R53  2.2k  [0603]  132.08,102.62 180 bottom
R54  2.2k  [0603]  132.08,100.71 0 bottom
R55  4.7k  [0603]  113.03,88.65 180 top
R56  5.1k  [0603]  155.45,103.89 270 bottom
R57  5.1k  [0603]  146.56,99.19 180 bottom
R58  2.2k  [0603]  157.99,102.62 180 bottom
R59  2.2k  [0603]  157.99,100.71 0 bottom
R60  4.7k  [0603]  138.94,88.65 180 top
S1  [TACTILE_SWITCH_SMD_5.2MM]  23.37,10.03 0 top
S2  [TACTILE_SWITCH_SMD_5.2MM]  15.75,10.03 0 top
S3  [TACTILE_SWITCH_SMD_5.2MM]  49.28,10.03 0 top
S4  [TACTILE_SWITCH_SMD_5.2MM]  41.66,10.03 0 top
S5  [TACTILE_SWITCH_SMD_5.2MM]  75.18,10.03 0 top
S6  [TACTILE_SWITCH_SMD_5.2MM]  67.56,10.03 0 top
S7  [TACTILE_SWITCH_SMD_5.2MM]  101.09,10.03 0 top
S8  [TACTILE_SWITCH_SMD_5.2MM]  93.47,10.03 0 top
S9  [TACTILE_SWITCH_SMD_5.2MM]  127,10.03 0 top
S10  [TACTILE_SWITCH_SMD_5.2MM]  119.38,10.03 0 top
S11  [TACTILE_SWITCH_SMD_5.2MM]  152.91,10.03 0 top
S12  [TACTILE_SWITCH_SMD_5.2MM]  145.29,10.03 0 top
S13  [TACTILE_SWITCH_SMD_5.2MM]  23.37,61.34 0 top
S14  [TACTILE_SWITCH_SMD_5.2MM]  15.75,61.34 0 top
S15  [TACTILE_SWITCH_SMD_5.2MM]  49.28,61.34 0 top
S16  [TACTILE_SWITCH_SMD_5.2MM]  41.66,61.34 0 top
S17  [TACTILE_SWITCH_SMD_5.2MM]  75.18,61.34 0 top
S18  [TACTILE_SWITCH_SMD_5.2MM]  67.56,61.34 0 top
S19  [TACTILE_SWITCH_SMD_5.2MM]  101.09,61.34 0 top
S20  [TACTILE_SWITCH_SMD_5.2MM]  93.47,61.34 0 top
S21  [TACTILE_SWITCH_SMD_5.2MM]  127,61.34 0 top
S22  [TACTILE_SWITCH_SMD_5.2MM]  119.38,61.34 0 top
S23  [TACTILE_SWITCH_SMD_5.2MM]  152.91,61.34 0 top
S24  [TACTILE_SWITCH_SMD_5.2MM]  145.29,61.34 0 top
SHLD  JUMPER-SMT_2_NC_TRACE_SILK  [SMT-JUMPER_2_NC_TRACE_SILK]  13.21,53.85 0 top
SHLD1  JUMPER-SMT_2_NC_TRACE_SILK  [SMT-JUMPER_2_NC_TRACE_SILK]  39.12,53.85 0 top
SHLD2  JUMPER-SMT_2_NC_TRACE_SILK  [SMT-JUMPER_2_NC_TRACE_SILK]  65.02,53.85 0 top
SHLD3  JUMPER-SMT_2_NC_TRACE_SILK  [SMT-JUMPER_2_NC_TRACE_SILK]  90.93,53.85 0 top
SHLD4  JUMPER-SMT_2_NC_TRACE_SILK  [SMT-JUMPER_2_NC_TRACE_SILK]  116.84,53.85 0 top
SHLD5  JUMPER-SMT_2_NC_TRACE_SILK  [SMT-JUMPER_2_NC_TRACE_SILK]  142.75,53.85 0 top
SHLD6  JUMPER-SMT_2_NC_TRACE_SILK  [SMT-JUMPER_2_NC_TRACE_SILK]  13.21,105.16 0 top
SHLD7  JUMPER-SMT_2_NC_TRACE_SILK  [SMT-JUMPER_2_NC_TRACE_SILK]  39.12,105.16 0 top
SHLD8  JUMPER-SMT_2_NC_TRACE_SILK  [SMT-JUMPER_2_NC_TRACE_SILK]  65.02,105.16 0 top
SHLD9  JUMPER-SMT_2_NC_TRACE_SILK  [SMT-JUMPER_2_NC_TRACE_SILK]  90.93,105.16 0 top
SHLD10  JUMPER-SMT_2_NC_TRACE_SILK  [SMT-JUMPER_2_NC_TRACE_SILK]  116.84,105.16 0 top
SHLD11  JUMPER-SMT_2_NC_TRACE_SILK  [SMT-JUMPER_2_NC_TRACE_SILK]  142.75,105.16 0 top
U1  XM125  [XM125_ACC]  19.56,24.64 0 top
U2  RT9080-33GJ5  [SOT23-5]  19.56,36.83 90 bottom
U3  RT9080-18GJ5  [SOT23-5]  18.29,28.45 180 bottom
U4  CH340C  [SO016]  20.83,43.05 180 bottom
U5  ESD Diode  [SOT-23-6]  22.1,48.26 270 bottom
U6  CH340C  [SO016]  46.74,43.05 180 bottom
U7  RT9080-33GJ5  [SOT23-5]  45.47,36.83 90 bottom
U8  RT9080-18GJ5  [SOT23-5]  44.2,28.45 180 bottom
U9  XM125  [XM125_ACC]  45.47,24.64 0 top
U10  ESD Diode  [SOT-23-6]  48.01,48.26 270 bottom
U11  CH340C  [SO016]  72.64,43.05 180 bottom
U12  RT9080-33GJ5  [SOT23-5]  71.37,36.83 90 bottom
U13  RT9080-18GJ5  [SOT23-5]  70.1,28.45 180 bottom
U14  XM125  [XM125_ACC]  71.37,24.64 0 top
U15  ESD Diode  [SOT-23-6]  73.91,48.26 270 bottom
U16  CH340C  [SO016]  98.55,43.05 180 bottom
U17  RT9080-33GJ5  [SOT23-5]  97.28,36.83 90 bottom
U18  RT9080-18GJ5  [SOT23-5]  96.01,28.45 180 bottom
U19  XM125  [XM125_ACC]  97.28,24.64 0 top
U20  ESD Diode  [SOT-23-6]  99.82,48.26 270 bottom
U21  CH340C  [SO016]  124.46,43.05 180 bottom
U22  RT9080-33GJ5  [SOT23-5]  123.19,36.83 90 bottom
U23  RT9080-18GJ5  [SOT23-5]  121.92,28.45 180 bottom
U24  XM125  [XM125_ACC]  123.19,24.64 0 top
U25  ESD Diode  [SOT-23-6]  125.73,48.26 270 bottom
U26  CH340C  [SO016]  150.37,43.05 180 bottom
U27  RT9080-33GJ5  [SOT23-5]  149.1,36.83 90 bottom
U28  RT9080-18GJ5  [SOT23-5]  147.83,28.45 180 bottom
U29  XM125  [XM125_ACC]  149.1,24.64 0 top
U30  ESD Diode  [SOT-23-6]  151.64,48.26 270 bottom
U31  CH340C  [SO016]  20.83,94.36 180 bottom
U32  RT9080-33GJ5  [SOT23-5]  19.56,88.14 90 bottom
U33  RT9080-18GJ5  [SOT23-5]  18.29,79.76 180 bottom
U34  XM125  [XM125_ACC]  19.56,75.95 0 top
U35  ESD Diode  [SOT-23-6]  22.1,99.57 270 bottom
U36  CH340C  [SO016]  46.74,94.36 180 bottom
U37  RT9080-33GJ5  [SOT23-5]  45.47,88.14 90 bottom
U38  RT9080-18GJ5  [SOT23-5]  44.2,79.76 180 bottom
U39  XM125  [XM125_ACC]  45.47,75.95 0 top
U40  ESD Diode  [SOT-23-6]  48.01,99.57 270 bottom
U41  CH340C  [SO016]  72.64,94.36 180 bottom
U42  RT9080-33GJ5  [SOT23-5]  71.37,88.14 90 bottom
U43  RT9080-18GJ5  [SOT23-5]  70.1,79.76 180 bottom
U44  XM125  [XM125_ACC]  71.37,75.95 0 top
U45  ESD Diode  [SOT-23-6]  73.91,99.57 270 bottom
U46  CH340C  [SO016]  98.55,94.36 180 bottom
U47  RT9080-33GJ5  [SOT23-5]  97.28,88.14 90 bottom
U48  RT9080-18GJ5  [SOT23-5]  96.01,79.76 180 bottom
U49  XM125  [XM125_ACC]  97.28,75.95 0 top
U50  ESD Diode  [SOT-23-6]  99.82,99.57 270 bottom
U51  CH340C  [SO016]  124.46,94.36 180 bottom
U52  RT9080-33GJ5  [SOT23-5]  123.19,88.14 90 bottom
U53  RT9080-18GJ5  [SOT23-5]  121.92,79.76 180 bottom
U54  XM125  [XM125_ACC]  123.19,75.95 0 top
U55  ESD Diode  [SOT-23-6]  125.73,99.57 270 bottom
U56  CH340C  [SO016]  150.37,94.36 180 bottom
U57  RT9080-33GJ5  [SOT23-5]  149.1,88.14 90 bottom
U58  RT9080-18GJ5  [SOT23-5]  147.83,79.76 180 bottom
U59  XM125  [XM125_ACC]  149.1,75.95 0 top
U60  ESD Diode  [SOT-23-6]  151.64,99.57 270 bottom
U$1  [#INT143]  9.78,34.8 270 top
U$2  [##INT#2]  10.54,34.8 0 bottom
U$3  [#LED#139]  12.19,37.34 0 bottom
U$4  [#GND#141]  10.79,24.64 0 bottom
U$5  [RST1630063003525]  16.26,13.34 0 top
U$6  [RX1152]  29.46,29.72 270 top
U$7  [#SWDIO#4]  11.68,19.56 0 bottom
U$8  [#VUSB#1]  11.3,27.18 0 bottom
U$9  [#3V3#17]  22.86,36.07 0 top
U$10  [#SCL#8]  28.45,17.02 0 bottom
U$11  [BOOT21630063003532]  23.5,13.34 0 top
U$12  [PWR21630063003533]  9.4,40.51 0 top
U$13  [#SDA#9]  28.32,19.56 0 bottom
U$14  [3V3144]  9.65,32.26 270 top
U$15  [1V8144]  9.65,29.72 270 top
U$16  [#1V8#141]  10.67,29.72 0 bottom
U$17  [RADAR_BREAKOUT1163]  19.3,8.13 0 bottom
U$18  [WU9]  29.46,14.48 270 top
U$19  [#RST6]  9.78,14.22 270 top
U$20  [#GPIO0#5]  27.56,34.8 0 bottom
U$21  [#GPIO1#5]  27.69,37.34 0 bottom
U$22  [#WU#14]  23.62,39.88 0 top
U$23  [#3V3#141]  10.79,32.26 0 bottom
U$24  [XM125_A1211163]  19.56,9.4 0 bottom
U$25  [#ADDR#16]  19.68,37.85 0 top
U$26  [#I2C#126]  25.53,50.04 0 top
U$27  [#GPIO2##BOOT#141]  30.99,45.85 90 bottom
U$28  [#DEBUG_RX#19]  25.65,29.72 0 bottom
U$29  [#SHLD#129]  13.21,50.55 270 top
U$30  [#GND#141]  10.79,22.1 0 bottom
U$31  [#GND#141]  28.32,24.64 0 bottom
U$32  [#3V3#141]  28.32,22.1 0 bottom
U$33  [3V3144]  29.46,22.23 270 top
U$34  [G144]  29.46,24.51 270 top
U$35  [G144]  9.65,24.64 270 top
U$36  [G144]  9.65,22.1 270 top
U$37  [BOOT21630063003532]  49.4,13.34 0 top
U$38  [VU146]  9.65,27.18 270 top
U$39  [IO0147]  29.46,34.8 270 top
U$40  [IO1148]  29.46,37.08 270 top
U$41  [BOOT1149]  29.46,39.88 270 top
U$42  [CLK1150]  9.65,17.02 270 top
U$43  [#SWDCLK#1151]  12.32,17.02 0 bottom
U$44  [TX1153]  29.46,32.26 270 top
U$45  [ADDR1154]  29.46,27.05 270 top
U$46  [SDA1155]  29.46,19.56 270 top
U$47  [SCL1157]  29.46,16.89 270 top
U$48  [#I2C_ADDR#12]  25.91,27.18 0 bottom
U$49  [SIO1159]  9.65,19.56 270 top
U$50  [#GND#17]  16.13,36.07 0 top
U$51  [#DEBUG_TX#18]  25.53,32.26 0 bottom
U$52  [RST1630063003525]  42.16,13.34 0 top
U$53  [RADAR_BREAKOUT1166]  19.81,42.54 0 top
U$54  [XM125_A1211167]  19.56,43.94 0 top
U$55  [#WAKE_UP#12]  26.04,14.48 0 bottom
U$56  [##RESET#13]  11.68,14.48 0 bottom
U$57  [PWR21630063003533]  35.31,40.51 0 top
U$58  [#SCL#8]  54.36,17.02 0 bottom
U$59  [#SDA#9]  54.23,19.56 0 bottom
U$60  [#GPIO0#5]  53.47,34.8 0 bottom
U$61  [#GPIO1#5]  53.59,37.34 0 bottom
U$62  [#I2C#126]  51.43,50.04 0 top
U$63  [#SHLD#129]  39.12,50.55 270 top
U$64  [#LED#139]  38.1,37.34 0 bottom
U$65  [#GPIO2##BOOT#141]  56.9,45.85 90 bottom
U$66  [#3V3#141]  36.7,32.26 0 bottom
U$67  [#1V8#141]  36.58,29.72 0 bottom
U$68  [#GND#141]  36.7,24.64 0 bottom
U$69  [#GND#141]  36.7,22.1 0 bottom
U$70  [#GND#141]  54.23,24.64 0 bottom
U$71  [#3V3#141]  54.23,22.1 0 bottom
U$72  [#INT143]  35.69,34.8 270 top
U$73  [3V3144]  35.56,32.26 270 top
U$74  [1V8144]  35.56,29.72 270 top
U$75  [3V3144]  55.37,22.23 270 top
U$76  [G144]  55.37,24.51 270 top
U$77  [G144]  35.56,24.64 270 top
U$78  [G144]  35.56,22.1 270 top
U$79  [VU146]  35.56,27.18 270 top
U$80  [IO0147]  55.37,34.8 270 top
U$81  [IO1148]  55.37,37.08 270 top
U$82  [BOOT1149]  55.37,39.88 270 top
U$83  [CLK1150]  35.56,17.02 270 top
U$84  [#SWDCLK#1151]  38.23,17.02 0 bottom
U$85  [RX1152]  55.37,29.72 270 top
U$86  [TX1153]  55.37,32.26 270 top
U$87  [ADDR1154]  55.37,27.05 270 top
U$88  [SDA1155]  55.37,19.56 270 top
U$89  [SCL1157]  55.37,16.89 270 top
U$90  [SIO1159]  35.56,19.56 270 top
U$91  [RADAR_BREAKOUT1163]  45.21,8.13 0 bottom
U$92  [XM125_A1211163]  45.47,9.4 0 bottom
U$93  [RADAR_BREAKOUT1166]  45.72,42.54 0 top
U$94  [XM125_A1211167]  45.47,43.94 0 top
U$95  [#VUSB#1]  37.21,27.18 0 bottom
U$96  [##INT#2]  36.45,34.8 0 bottom
U$97  [#SWDIO#4]  37.59,19.56 0 bottom
U$98  [#RST6]  35.69,14.22 270 top
U$99  [WU9]  55.37,14.48 270 top
U$100  [#I2C_ADDR#12]  51.82,27.18 0 bottom
U$101  [#WAKE_UP#12]  51.94,14.48 0 bottom
U$102  [##RESET#13]  37.59,14.48 0 bottom
U$103  [#WU#14]  49.53,39.88 0 top
U$104  [#ADDR#16]  45.59,37.85 0 top
U$105  [#3V3#17]  48.77,36.07 0 top
U$106  [#GND#17]  42.04,36.07 0 top
U$107  [#DEBUG_TX#18]  51.43,32.26 0 bottom
U$108  [#DEBUG_RX#19]  51.56,29.72 0 bottom
U$109  [BOOT21630063003532]  75.31,13.34 0 top
U$110  [RST1630063003525]  68.07,13.34 0 top
U$111  [PWR21630063003533]  61.21,40.51 0 top
U$112  [#SCL#8]  80.26,17.02 0 bottom
U$113  [#SDA#9]  80.14,19.56 0 bottom
U$114  [#GPIO0#5]  79.38,34.8 0 bottom
U$115  [#GPIO1#5]  79.5,37.34 0 bottom
U$116  [#I2C#126]  77.34,50.04 0 top
U$117  [#SHLD#129]  65.02,50.55 270 top
U$118  [#LED#139]  64.01,37.34 0 bottom
U$119  [#GPIO2##BOOT#141]  82.8,45.85 90 bottom
U$120  [#3V3#141]  62.61,32.26 0 bottom
U$121  [#1V8#141]  62.48,29.72 0 bottom
U$122  [#GND#141]  62.61,24.64 0 bottom
U$123  [#GND#141]  62.61,22.1 0 bottom
U$124  [#GND#141]  80.14,24.64 0 bottom
U$125  [#3V3#141]  80.14,22.1 0 bottom
U$126  [#INT143]  61.59,34.8 270 top
U$127  [3V3144]  61.47,32.26 270 top
U$128  [1V8144]  61.47,29.72 270 top
U$129  [3V3144]  81.28,22.23 270 top
U$130  [G144]  81.28,24.51 270 top
U$131  [G144]  61.47,24.64 270 top
U$132  [G144]  61.47,22.1 270 top
U$133  [VU146]  61.47,27.18 270 top
U$134  [IO0147]  81.28,34.8 270 top
U$135  [IO1148]  81.28,37.08 270 top
U$136  [BOOT1149]  81.28,39.88 270 top
U$137  [CLK1150]  61.47,17.02 270 top
U$138  [#SWDCLK#1151]  64.14,17.02 0 bottom
U$139  [RX1152]  81.28,29.72 270 top
U$140  [TX1153]  81.28,32.26 270 top
U$141  [ADDR1154]  81.28,27.05 270 top
U$142  [SDA1155]  81.28,19.56 270 top
U$143  [SCL1157]  81.28,16.89 270 top
U$144  [SIO1159]  61.47,19.56 270 top
U$145  [RADAR_BREAKOUT1163]  71.12,8.13 0 bottom
U$146  [XM125_A1211163]  71.37,9.4 0 bottom
U$147  [RADAR_BREAKOUT1166]  71.63,42.54 0 top
U$148  [XM125_A1211167]  71.37,43.94 0 top
U$149  [#VUSB#1]  63.12,27.18 0 bottom
U$150  [##INT#2]  62.36,34.8 0 bottom
U$151  [#SWDIO#4]  63.5,19.56 0 bottom
U$152  [#RST6]  61.59,14.22 270 top
U$153  [WU9]  81.28,14.48 270 top
U$154  [#I2C_ADDR#12]  77.72,27.18 0 bottom
U$155  [#WAKE_UP#12]  77.85,14.48 0 bottom
U$156  [##RESET#13]  63.5,14.48 0 bottom
U$157  [#WU#14]  75.44,39.88 0 top
U$158  [#ADDR#16]  71.5,37.85 0 top
U$159  [#3V3#17]  74.68,36.07 0 top
U$160  [#GND#17]  67.95,36.07 0 top
U$161  [#DEBUG_TX#18]  77.34,32.26 0 bottom
U$162  [#DEBUG_RX#19]  77.47,29.72 0 bottom
U$163  [BOOT21630063003532]  101.22,13.34 0 top
U$164  [RST1630063003525]  93.98,13.34 0 top
U$165  [PWR21630063003533]  87.12,40.51 0 top
U$166  [#SCL#8]  106.17,17.02 0 bottom
U$167  [#SDA#9]  106.05,19.56 0 bottom
U$168  [#GPIO0#5]  105.28,34.8 0 bottom
U$169  [#GPIO1#5]  105.41,37.34 0 bottom
U$170  [#I2C#126]  103.25,50.04 0 top
U$171  [#SHLD#129]  90.93,50.55 270 top
U$172  [#LED#139]  89.92,37.34 0 bottom
U$173  [#GPIO2##BOOT#141]  108.71,45.85 90 bottom
U$174  [#3V3#141]  88.52,32.26 0 bottom
U$175  [#1V8#141]  88.39,29.72 0 bottom
U$176  [#GND#141]  88.52,24.64 0 bottom
U$177  [#GND#141]  88.52,22.1 0 bottom
U$178  [#GND#141]  106.05,24.64 0 bottom
U$179  [#3V3#141]  106.05,22.1 0 bottom
U$180  [#INT143]  87.5,34.8 270 top
U$181  [3V3144]  87.38,32.26 270 top
U$182  [1V8144]  87.38,29.72 270 top
U$183  [3V3144]  107.19,22.23 270 top
U$184  [G144]  107.19,24.51 270 top
U$185  [G144]  87.38,24.64 270 top
U$186  [G144]  87.38,22.1 270 top
U$187  [VU146]  87.38,27.18 270 top
U$188  [IO0147]  107.19,34.8 270 top
U$189  [IO1148]  107.19,37.08 270 top
U$190  [BOOT1149]  107.19,39.88 270 top
U$191  [CLK1150]  87.38,17.02 270 top
U$192  [#SWDCLK#1151]  90.04,17.02 0 bottom
U$193  [RX1152]  107.19,29.72 270 top
U$194  [TX1153]  107.19,32.26 270 top
U$195  [ADDR1154]  107.19,27.05 270 top
U$196  [SDA1155]  107.19,19.56 270 top
U$197  [SCL1157]  107.19,16.89 270 top
U$198  [SIO1159]  87.38,19.56 270 top
U$199  [RADAR_BREAKOUT1163]  97.03,8.13 0 bottom
U$200  [XM125_A1211163]  97.28,9.4 0 bottom
U$201  [RADAR_BREAKOUT1166]  97.54,42.54 0 top
U$202  [XM125_A1211167]  97.28,43.94 0 top
U$203  [#VUSB#1]  89.03,27.18 0 bottom
U$204  [##INT#2]  88.27,34.8 0 bottom
U$205  [#SWDIO#4]  89.41,19.56 0 bottom
U$206  [#RST6]  87.5,14.22 270 top
U$207  [WU9]  107.19,14.48 270 top
U$208  [#I2C_ADDR#12]  103.63,27.18 0 bottom
U$209  [#WAKE_UP#12]  103.76,14.48 0 bottom
U$210  [##RESET#13]  89.41,14.48 0 bottom
U$211  [#WU#14]  101.35,39.88 0 top
U$212  [#ADDR#16]  97.41,37.85 0 top
U$213  [#3V3#17]  100.58,36.07 0 top
U$214  [#GND#17]  93.85,36.07 0 top
U$215  [#DEBUG_TX#18]  103.25,32.26 0 bottom
U$216  [#DEBUG_RX#19]  103.38,29.72 0 bottom
U$217  [BOOT21630063003532]  127.13,13.34 0 top
U$218  [RST1630063003525]  119.89,13.34 0 top
U$219  [PWR21630063003533]  113.03,40.51 0 top
U$220  [#SCL#8]  132.08,17.02 0 bottom
U$221  [#SDA#9]  131.95,19.56 0 bottom
U$222  [#GPIO0#5]  131.19,34.8 0 bottom
U$223  [#GPIO1#5]  131.32,37.34 0 bottom
U$224  [#I2C#126]  129.16,50.04 0 top
U$225  [#SHLD#129]  116.84,50.55 270 top
U$226  [#LED#139]  115.82,37.34 0 bottom
U$227  [#GPIO2##BOOT#141]  134.62,45.85 90 bottom
U$228  [#3V3#141]  114.43,32.26 0 bottom
U$229  [#1V8#141]  114.3,29.72 0 bottom
U$230  [#GND#141]  114.43,24.64 0 bottom
U$231  [#GND#141]  114.43,22.1 0 bottom
U$232  [#GND#141]  131.95,24.64 0 bottom
U$233  [#3V3#141]  131.95,22.1 0 bottom
U$234  [#INT143]  113.41,34.8 270 top
U$235  [3V3144]  113.28,32.26 270 top
U$236  [1V8144]  113.28,29.72 270 top
U$237  [3V3144]  133.1,22.23 270 top
U$238  [G144]  133.1,24.51 270 top
U$239  [G144]  113.28,24.64 270 top
U$240  [G144]  113.28,22.1 270 top
U$241  [VU146]  113.28,27.18 270 top
U$242  [IO0147]  133.1,34.8 270 top
U$243  [IO1148]  133.1,37.08 270 top
U$244  [BOOT1149]  133.1,39.88 270 top
U$245  [CLK1150]  113.28,17.02 270 top
U$246  [#SWDCLK#1151]  115.95,17.02 0 bottom
U$247  [RX1152]  133.1,29.72 270 top
U$248  [TX1153]  133.1,32.26 270 top
U$249  [ADDR1154]  133.1,27.05 270 top
U$250  [SDA1155]  133.1,19.56 270 top
U$251  [SCL1157]  133.1,16.89 270 top
U$252  [SIO1159]  113.28,19.56 270 top
U$253  [RADAR_BREAKOUT1163]  122.94,8.13 0 bottom
U$254  [XM125_A1211163]  123.19,9.4 0 bottom
U$255  [RADAR_BREAKOUT1166]  123.44,42.54 0 top
U$256  [XM125_A1211167]  123.19,43.94 0 top
U$257  [#VUSB#1]  114.94,27.18 0 bottom
U$258  [##INT#2]  114.17,34.8 0 bottom
U$259  [#SWDIO#4]  115.32,19.56 0 bottom
U$260  [#RST6]  113.41,14.22 270 top
U$261  [WU9]  133.1,14.48 270 top
U$262  [#I2C_ADDR#12]  129.54,27.18 0 bottom
U$263  [#WAKE_UP#12]  129.67,14.48 0 bottom
U$264  [##RESET#13]  115.32,14.48 0 bottom
U$265  [#WU#14]  127.25,39.88 0 top
U$266  [#ADDR#16]  123.32,37.85 0 top
U$267  [#3V3#17]  126.49,36.07 0 top
U$268  [#GND#17]  119.76,36.07 0 top
U$269  [#DEBUG_TX#18]  129.16,32.26 0 bottom
U$270  [#DEBUG_RX#19]  129.29,29.72 0 bottom
U$271  [BOOT21630063003532]  153.03,13.34 0 top
U$272  [RST1630063003525]  145.8,13.34 0 top
U$273  [PWR21630063003533]  138.94,40.51 0 top
U$274  [#SCL#8]  157.99,17.02 0 bottom
U$275  [#SDA#9]  157.86,19.56 0 bottom
U$276  [#GPIO0#5]  157.1,34.8 0 bottom
U$277  [#GPIO1#5]  157.23,37.34 0 bottom
U$278  [#I2C#126]  155.07,50.04 0 top
U$279  [#SHLD#129]  142.75,50.55 270 top
U$280  [#LED#139]  141.73,37.34 0 bottom
U$281  [#GPIO2##BOOT#141]  160.53,45.85 90 bottom
U$282  [#3V3#141]  140.34,32.26 0 bottom
U$283  [#1V8#141]  140.21,29.72 0 bottom
U$284  [#GND#141]  140.34,24.64 0 bottom
U$285  [#GND#141]  140.34,22.1 0 bottom
U$286  [#GND#141]  157.86,24.64 0 bottom
U$287  [#3V3#141]  157.86,22.1 0 bottom
U$288  [#INT143]  139.32,34.8 270 top
U$289  [3V3144]  139.19,32.26 270 top
U$290  [1V8144]  139.19,29.72 270 top
U$291  [3V3144]  159,22.23 270 top
U$292  [G144]  159,24.51 270 top
U$293  [G144]  139.19,24.64 270 top
U$294  [G144]  139.19,22.1 270 top
U$295  [VU146]  139.19,27.18 270 top
U$296  [IO0147]  159,34.8 270 top
U$297  [IO1148]  159,37.08 270 top
U$298  [BOOT1149]  159,39.88 270 top
U$299  [CLK1150]  139.19,17.02 270 top
U$300  [#SWDCLK#1151]  141.86,17.02 0 bottom
U$301  [RX1152]  159,29.72 270 top
U$302  [TX1153]  159,32.26 270 top
U$303  [ADDR1154]  159,27.05 270 top
U$304  [SDA1155]  159,19.56 270 top
U$305  [SCL1157]  159,16.89 270 top
U$306  [SIO1159]  139.19,19.56 270 top
U$307  [RADAR_BREAKOUT1163]  148.84,8.13 0 bottom
U$308  [XM125_A1211163]  149.1,9.4 0 bottom
U$309  [RADAR_BREAKOUT1166]  149.35,42.54 0 top
U$310  [XM125_A1211167]  149.1,43.94 0 top
U$311  [#VUSB#1]  140.84,27.18 0 bottom
U$312  [##INT#2]  140.08,34.8 0 bottom
U$313  [#SWDIO#4]  141.22,19.56 0 bottom
U$314  [#RST6]  139.32,14.22 270 top
U$315  [WU9]  159,14.48 270 top
U$316  [#I2C_ADDR#12]  155.45,27.18 0 bottom
U$317  [#WAKE_UP#12]  155.58,14.48 0 bottom
U$318  [##RESET#13]  141.22,14.48 0 bottom
U$319  [#WU#14]  153.16,39.88 0 top
U$320  [#ADDR#16]  149.22,37.85 0 top
U$321  [#3V3#17]  152.4,36.07 0 top
U$322  [#GND#17]  145.67,36.07 0 top
U$323  [#DEBUG_TX#18]  155.07,32.26 0 bottom
U$324  [#DEBUG_RX#19]  155.19,29.72 0 bottom
U$325  [BOOT21630063003532]  23.5,64.64 0 top
U$326  [RST1630063003525]  16.26,64.64 0 top
U$327  [PWR21630063003533]  9.4,91.82 0 top
U$328  [#SCL#8]  28.45,68.33 0 bottom
U$329  [#SDA#9]  28.32,70.87 0 bottom
U$330  [#GPIO0#5]  27.56,86.11 0 bottom
U$331  [#GPIO1#5]  27.69,88.65 0 bottom
U$332  [#I2C#126]  25.53,101.35 0 top
U$333  [#SHLD#129]  13.21,101.85 270 top
U$334  [#LED#139]  12.19,88.65 0 bottom
U$335  [#GPIO2##BOOT#141]  30.99,97.16 90 bottom
U$336  [#3V3#141]  10.79,83.57 0 bottom
U$337  [#1V8#141]  10.67,81.03 0 bottom
U$338  [#GND#141]  10.79,75.95 0 bottom
U$339  [#GND#141]  10.79,73.41 0 bottom
U$340  [#GND#141]  28.32,75.95 0 bottom
U$341  [#3V3#141]  28.32,73.41 0 bottom
U$342  [#INT143]  9.78,86.11 270 top
U$343  [3V3144]  9.65,83.57 270 top
U$344  [1V8144]  9.65,81.03 270 top
U$345  [3V3144]  29.46,73.53 270 top
U$346  [G144]  29.46,75.82 270 top
U$347  [G144]  9.65,75.95 270 top
U$348  [G144]  9.65,73.41 270 top
U$349  [VU146]  9.65,78.49 270 top
U$350  [IO0147]  29.46,86.11 270 top
U$351  [IO1148]  29.46,88.39 270 top
U$352  [BOOT1149]  29.46,91.19 270 top
U$353  [CLK1150]  9.65,68.33 270 top
U$354  [#SWDCLK#1151]  12.32,68.33 0 bottom
U$355  [RX1152]  29.46,81.03 270 top
U$356  [TX1153]  29.46,83.57 270 top
U$357  [ADDR1154]  29.46,78.36 270 top
U$358  [SDA1155]  29.46,70.87 270 top
U$359  [SCL1157]  29.46,68.2 270 top
U$360  [SIO1159]  9.65,70.87 270 top
U$361  [RADAR_BREAKOUT1163]  19.3,59.44 0 bottom
U$362  [XM125_A1211163]  19.56,60.71 0 bottom
U$363  [RADAR_BREAKOUT1166]  19.81,93.85 0 top
U$364  [XM125_A1211167]  19.56,95.25 0 top
U$365  [#VUSB#1]  11.3,78.49 0 bottom
U$366  [##INT#2]  10.54,86.11 0 bottom
U$367  [#SWDIO#4]  11.68,70.87 0 bottom
U$368  [#RST6]  9.78,65.53 270 top
U$369  [WU9]  29.46,65.79 270 top
U$370  [#I2C_ADDR#12]  25.91,78.49 0 bottom
U$371  [#WAKE_UP#12]  26.04,65.79 0 bottom
U$372  [##RESET#13]  11.68,65.79 0 bottom
U$373  [#WU#14]  23.62,91.19 0 top
U$374  [#ADDR#16]  19.68,89.15 0 top
U$375  [#3V3#17]  22.86,87.38 0 top
U$376  [#GND#17]  16.13,87.38 0 top
U$377  [#DEBUG_TX#18]  25.53,83.57 0 bottom
U$378  [#DEBUG_RX#19]  25.65,81.03 0 bottom
U$379  [BOOT21630063003532]  49.4,64.64 0 top
U$380  [RST1630063003525]  42.16,64.64 0 top
U$381  [PWR21630063003533]  35.31,91.82 0 top
U$382  [#SCL#8]  54.36,68.33 0 bottom
U$383  [#SDA#9]  54.23,70.87 0 bottom
U$384  [#GPIO0#5]  53.47,86.11 0 bottom
U$385  [#GPIO1#5]  53.59,88.65 0 bottom
U$386  [#I2C#126]  51.43,101.35 0 top
U$387  [#SHLD#129]  39.12,101.85 270 top
U$388  [#LED#139]  38.1,88.65 0 bottom
U$389  [#GPIO2##BOOT#141]  56.9,97.16 90 bottom
U$390  [#3V3#141]  36.7,83.57 0 bottom
U$391  [#1V8#141]  36.58,81.03 0 bottom
U$392  [#GND#141]  36.7,75.95 0 bottom
U$393  [#GND#141]  36.7,73.41 0 bottom
U$394  [#GND#141]  54.23,75.95 0 bottom
U$395  [#3V3#141]  54.23,73.41 0 bottom
U$396  [#INT143]  35.69,86.11 270 top
U$397  [3V3144]  35.56,83.57 270 top
U$398  [1V8144]  35.56,81.03 270 top
U$399  [3V3144]  55.37,73.53 270 top
U$400  [G144]  55.37,75.82 270 top
U$401  [G144]  35.56,75.95 270 top
U$402  [G144]  35.56,73.41 270 top
U$403  [VU146]  35.56,78.49 270 top
U$404  [IO0147]  55.37,86.11 270 top
U$405  [IO1148]  55.37,88.39 270 top
U$406  [BOOT1149]  55.37,91.19 270 top
U$407  [CLK1150]  35.56,68.33 270 top
U$408  [#SWDCLK#1151]  38.23,68.33 0 bottom
U$409  [RX1152]  55.37,81.03 270 top
U$410  [TX1153]  55.37,83.57 270 top
U$411  [ADDR1154]  55.37,78.36 270 top
U$412  [SDA1155]  55.37,70.87 270 top
U$413  [SCL1157]  55.37,68.2 270 top
U$414  [SIO1159]  35.56,70.87 270 top
U$415  [RADAR_BREAKOUT1163]  45.21,59.44 0 bottom
U$416  [XM125_A1211163]  45.47,60.71 0 bottom
U$417  [RADAR_BREAKOUT1166]  45.72,93.85 0 top
U$418  [XM125_A1211167]  45.47,95.25 0 top
U$419  [#VUSB#1]  37.21,78.49 0 bottom
U$420  [##INT#2]  36.45,86.11 0 bottom
U$421  [#SWDIO#4]  37.59,70.87 0 bottom
U$422  [#RST6]  35.69,65.53 270 top
U$423  [WU9]  55.37,65.79 270 top
U$424  [#I2C_ADDR#12]  51.82,78.49 0 bottom
U$425  [#WAKE_UP#12]  51.94,65.79 0 bottom
U$426  [##RESET#13]  37.59,65.79 0 bottom
U$427  [#WU#14]  49.53,91.19 0 top
U$428  [#ADDR#16]  45.59,89.15 0 top
U$429  [#3V3#17]  48.77,87.38 0 top
U$430  [#GND#17]  42.04,87.38 0 top
U$431  [#DEBUG_TX#18]  51.43,83.57 0 bottom
U$432  [#DEBUG_RX#19]  51.56,81.03 0 bottom
U$433  [BOOT21630063003532]  75.31,64.64 0 top
U$434  [RST1630063003525]  68.07,64.64 0 top
U$435  [PWR21630063003533]  61.21,91.82 0 top
U$436  [#SCL#8]  80.26,68.33 0 bottom
U$437  [#SDA#9]  80.14,70.87 0 bottom
U$438  [#GPIO0#5]  79.38,86.11 0 bottom
U$439  [#GPIO1#5]  79.5,88.65 0 bottom
U$440  [#I2C#126]  77.34,101.35 0 top
U$441  [#SHLD#129]  65.02,101.85 270 top
U$442  [#LED#139]  64.01,88.65 0 bottom
U$443  [#GPIO2##BOOT#141]  82.8,97.16 90 bottom
U$444  [#3V3#141]  62.61,83.57 0 bottom
U$445  [#1V8#141]  62.48,81.03 0 bottom
U$446  [#GND#141]  62.61,75.95 0 bottom
U$447  [#GND#141]  62.61,73.41 0 bottom
U$448  [#GND#141]  80.14,75.95 0 bottom
U$449  [#3V3#141]  80.14,73.41 0 bottom
U$450  [#INT143]  61.59,86.11 270 top
U$451  [3V3144]  61.47,83.57 270 top
U$452  [1V8144]  61.47,81.03 270 top
U$453  [3V3144]  81.28,73.53 270 top
U$454  [G144]  81.28,75.82 270 top
U$455  [G144]  61.47,75.95 270 top
U$456  [G144]  61.47,73.41 270 top
U$457  [VU146]  61.47,78.49 270 top
U$458  [IO0147]  81.28,86.11 270 top
U$459  [IO1148]  81.28,88.39 270 top
U$460  [BOOT1149]  81.28,91.19 270 top
U$461  [CLK1150]  61.47,68.33 270 top
U$462  [#SWDCLK#1151]  64.14,68.33 0 bottom
U$463  [RX1152]  81.28,81.03 270 top
U$464  [TX1153]  81.28,83.57 270 top
U$465  [ADDR1154]  81.28,78.36 270 top
U$466  [SDA1155]  81.28,70.87 270 top
U$467  [SCL1157]  81.28,68.2 270 top
U$468  [SIO1159]  61.47,70.87 270 top
U$469  [RADAR_BREAKOUT1163]  71.12,59.44 0 bottom
U$470  [XM125_A1211163]  71.37,60.71 0 bottom
U$471  [RADAR_BREAKOUT1166]  71.63,93.85 0 top
U$472  [XM125_A1211167]  71.37,95.25 0 top
U$473  [#VUSB#1]  63.12,78.49 0 bottom
U$474  [##INT#2]  62.36,86.11 0 bottom
U$475  [#SWDIO#4]  63.5,70.87 0 bottom
U$476  [#RST6]  61.59,65.53 270 top
U$477  [WU9]  81.28,65.79 270 top
U$478  [#I2C_ADDR#12]  77.72,78.49 0 bottom